# Altium PCB DPRS10A16V.PcbDoc (part 1 of 2)
Units mil, origin at the board's own origin, x right, y up, seen from the top; angles counter-clockwise.
Board outline 1945 x 1815 mil, 4 copper layers (Top Layer, Int1 (GND), Int2 (PWR), Bottom Layer), stack 45.09 mil thick; 68 components, 30 nets, 208 pads, 417 vias.
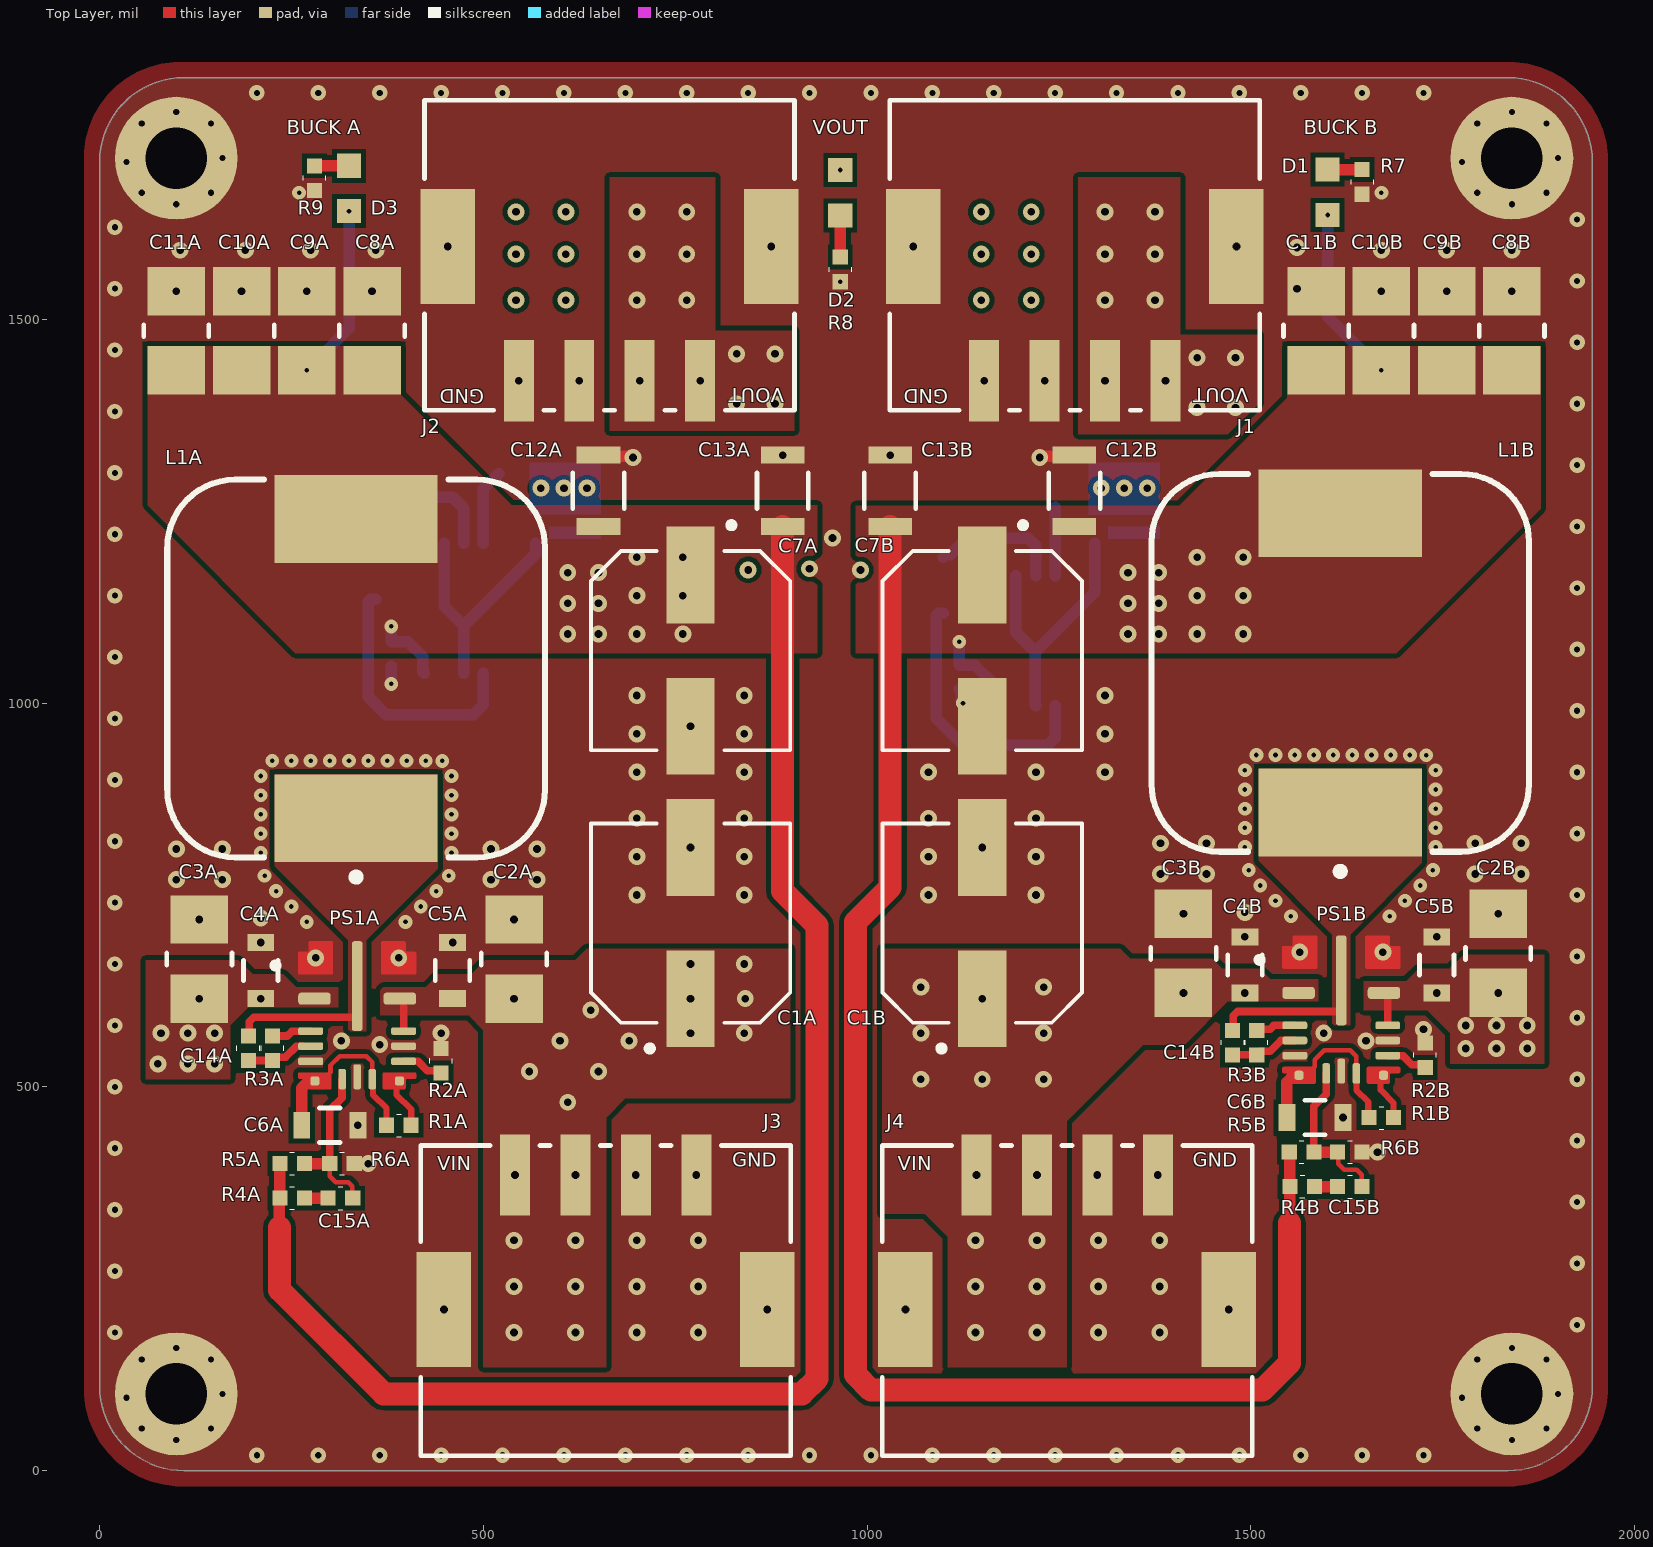
[diagram p0: Top Layer view]
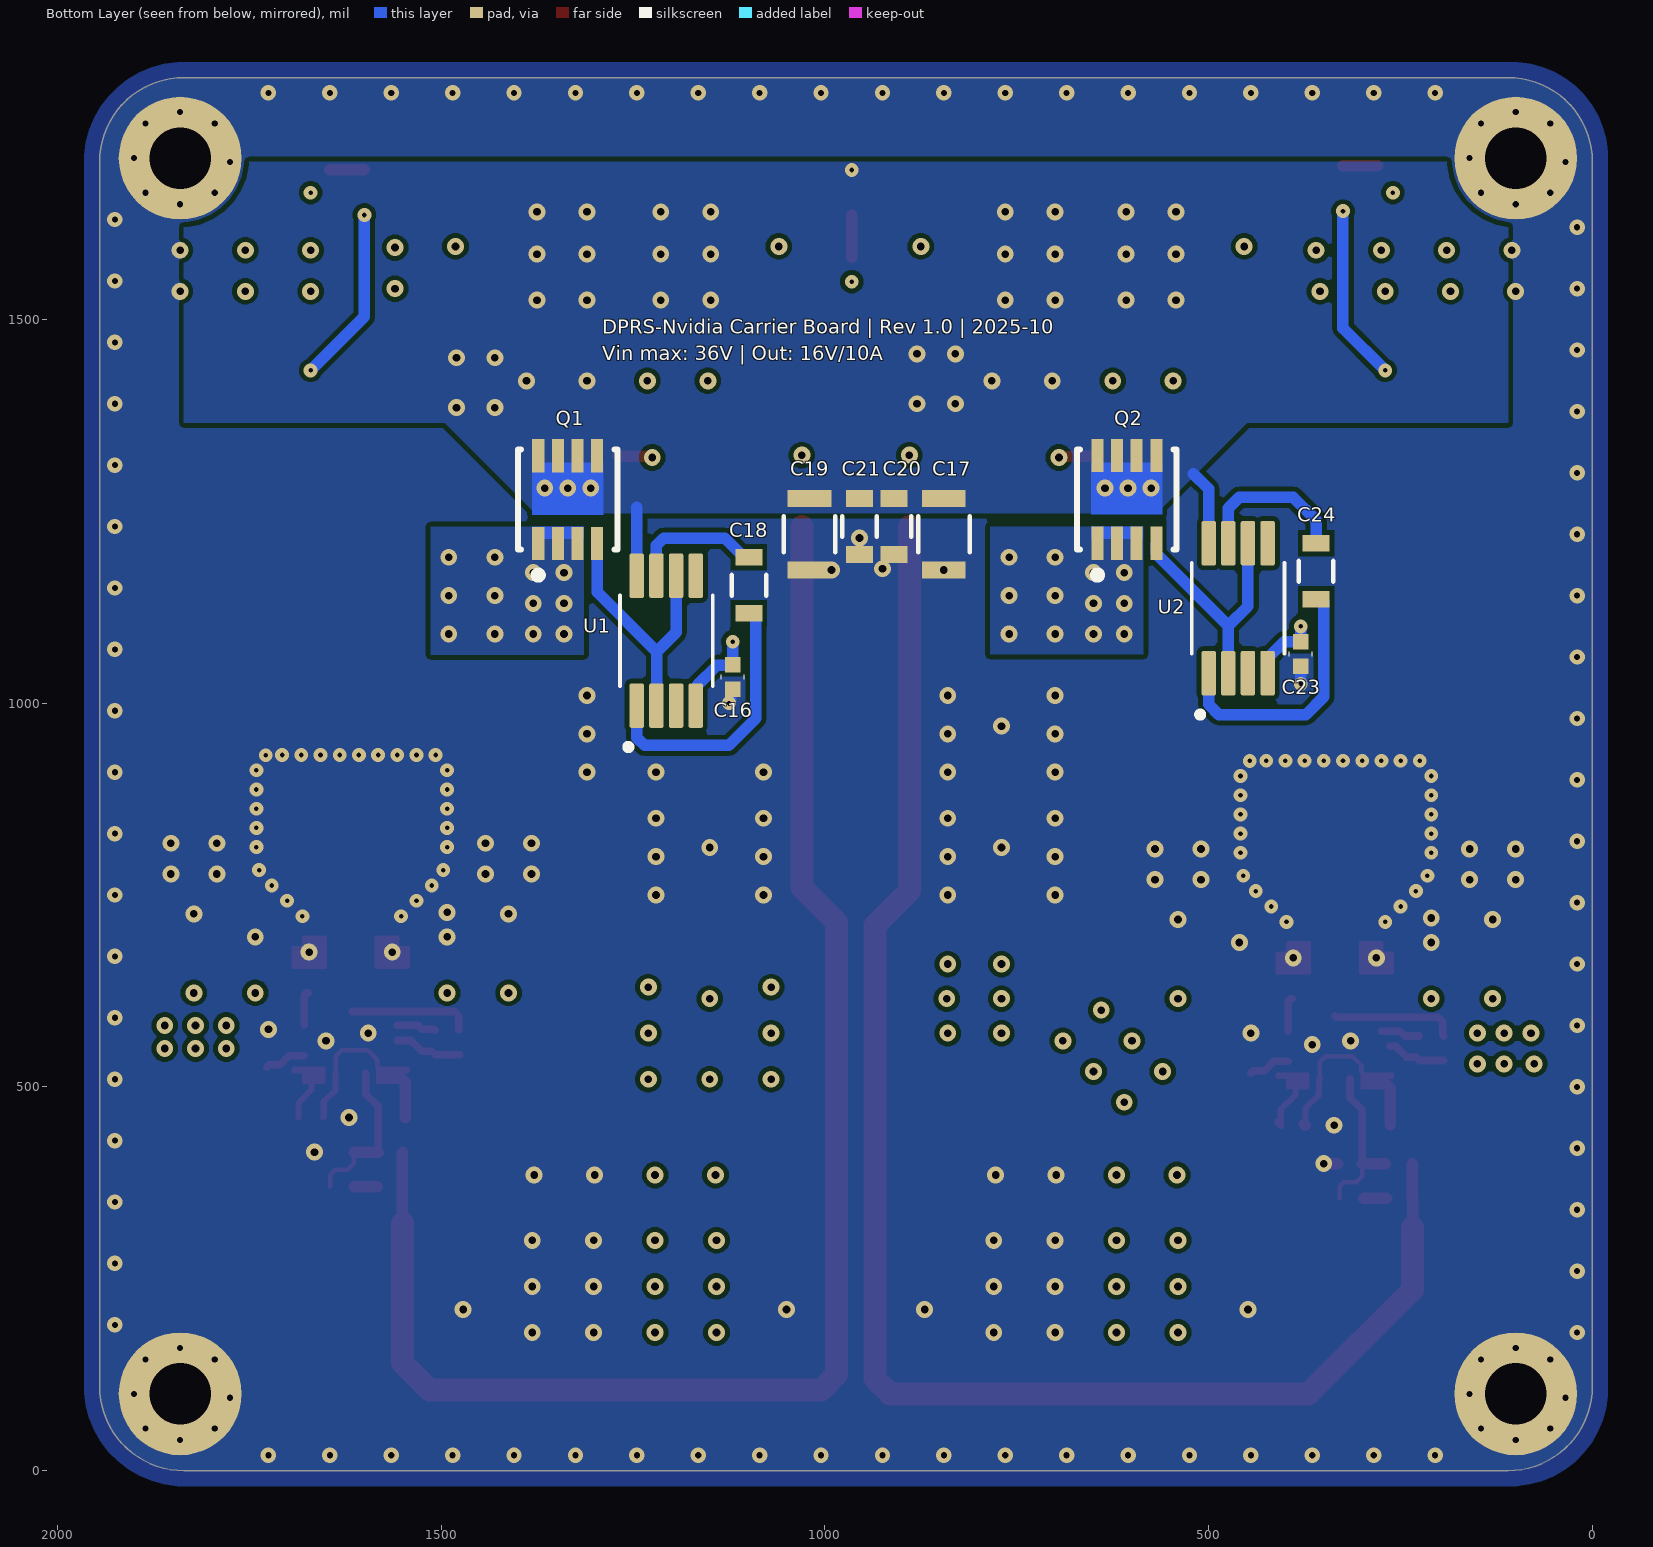
[diagram p1: Bottom Layer view, seen from below]
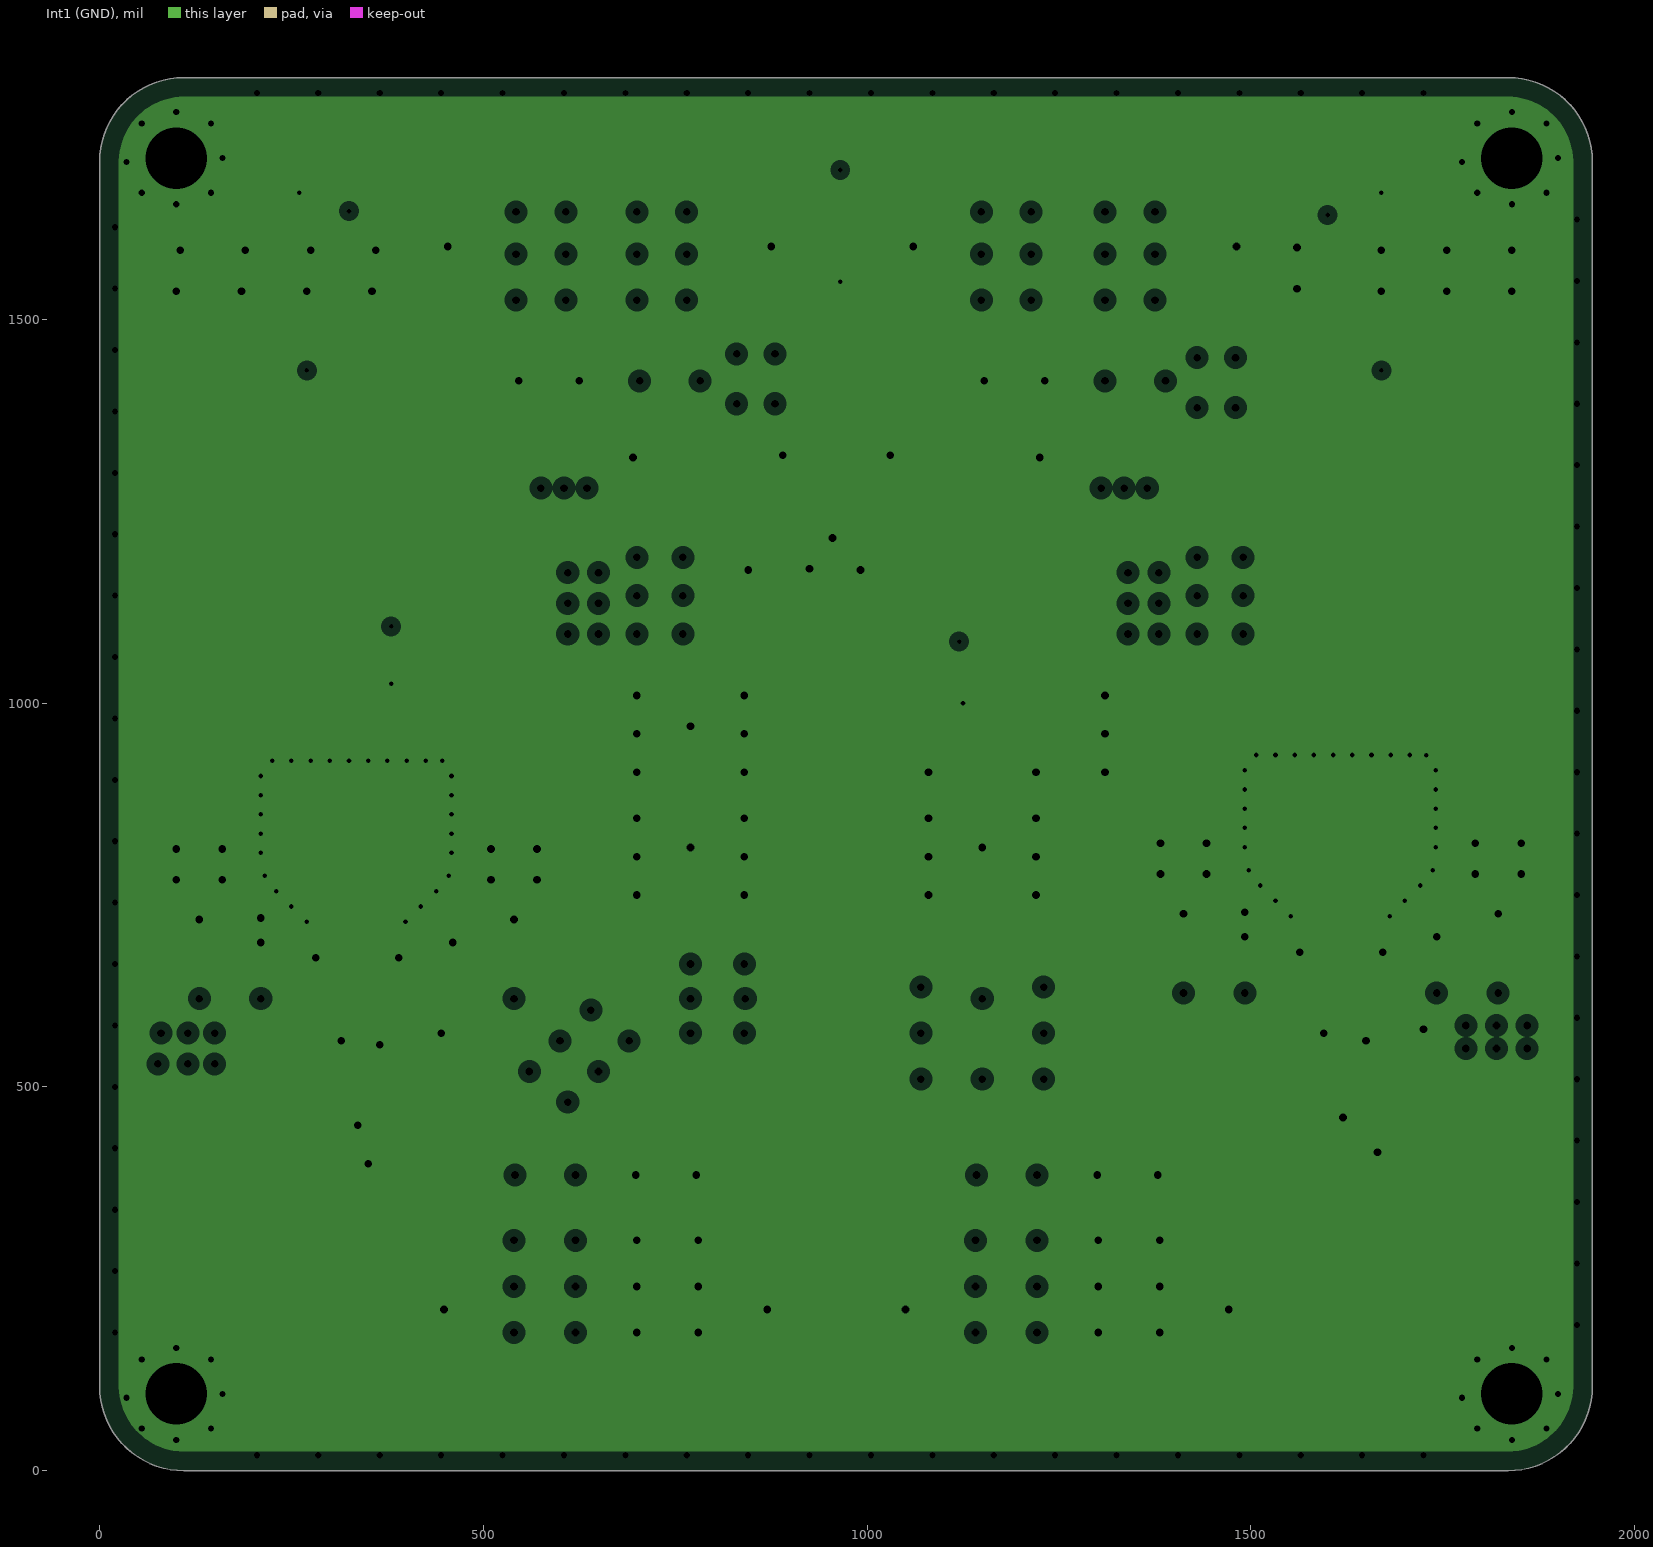
[diagram p2: Int1 (GND), clearances drawn from the general rule]
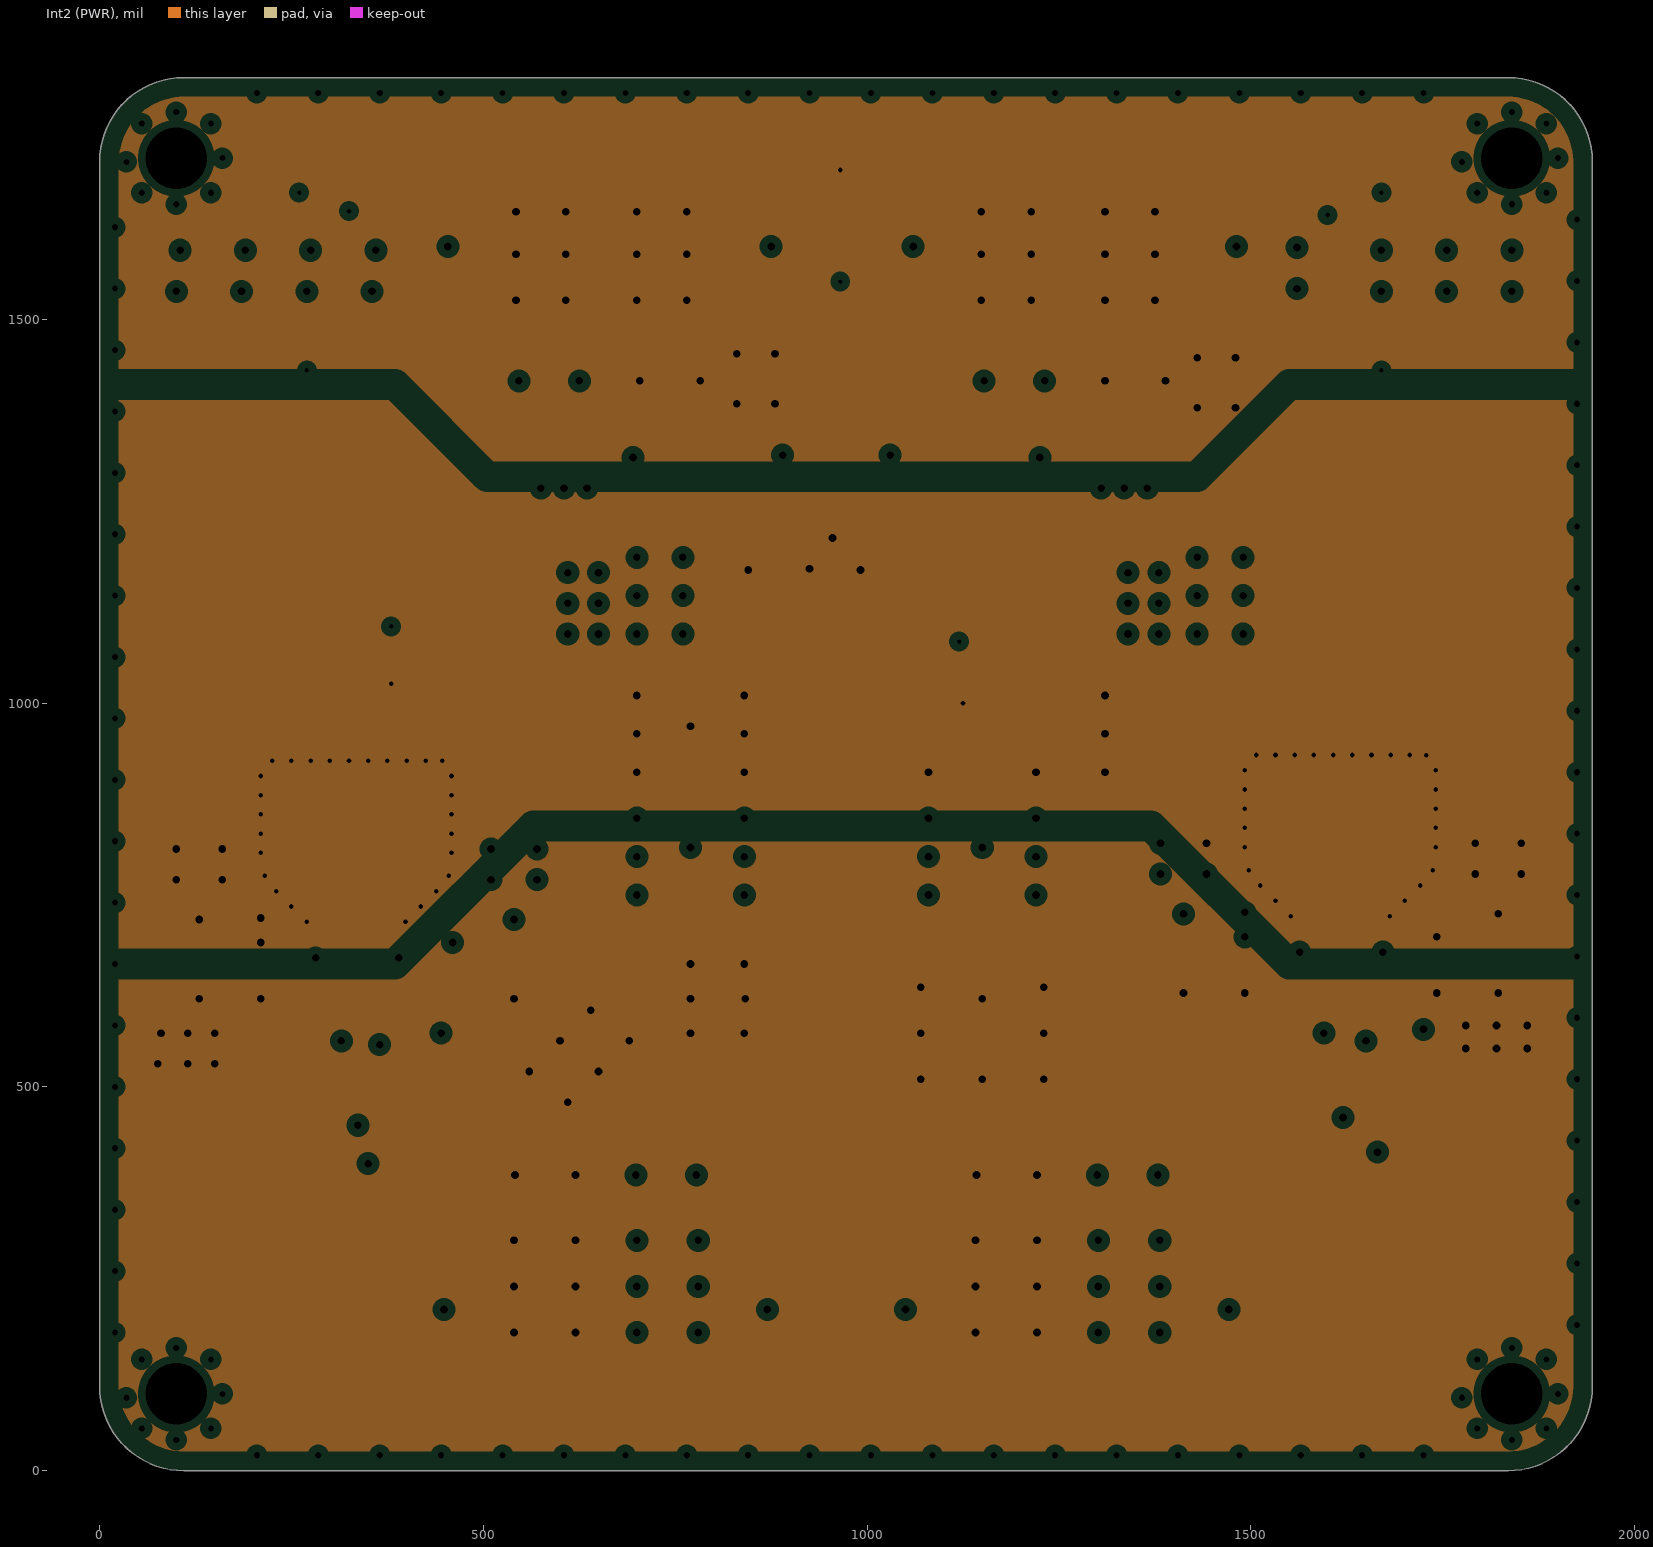
[diagram p3: Int2 (PWR), clearances drawn from the general rule]
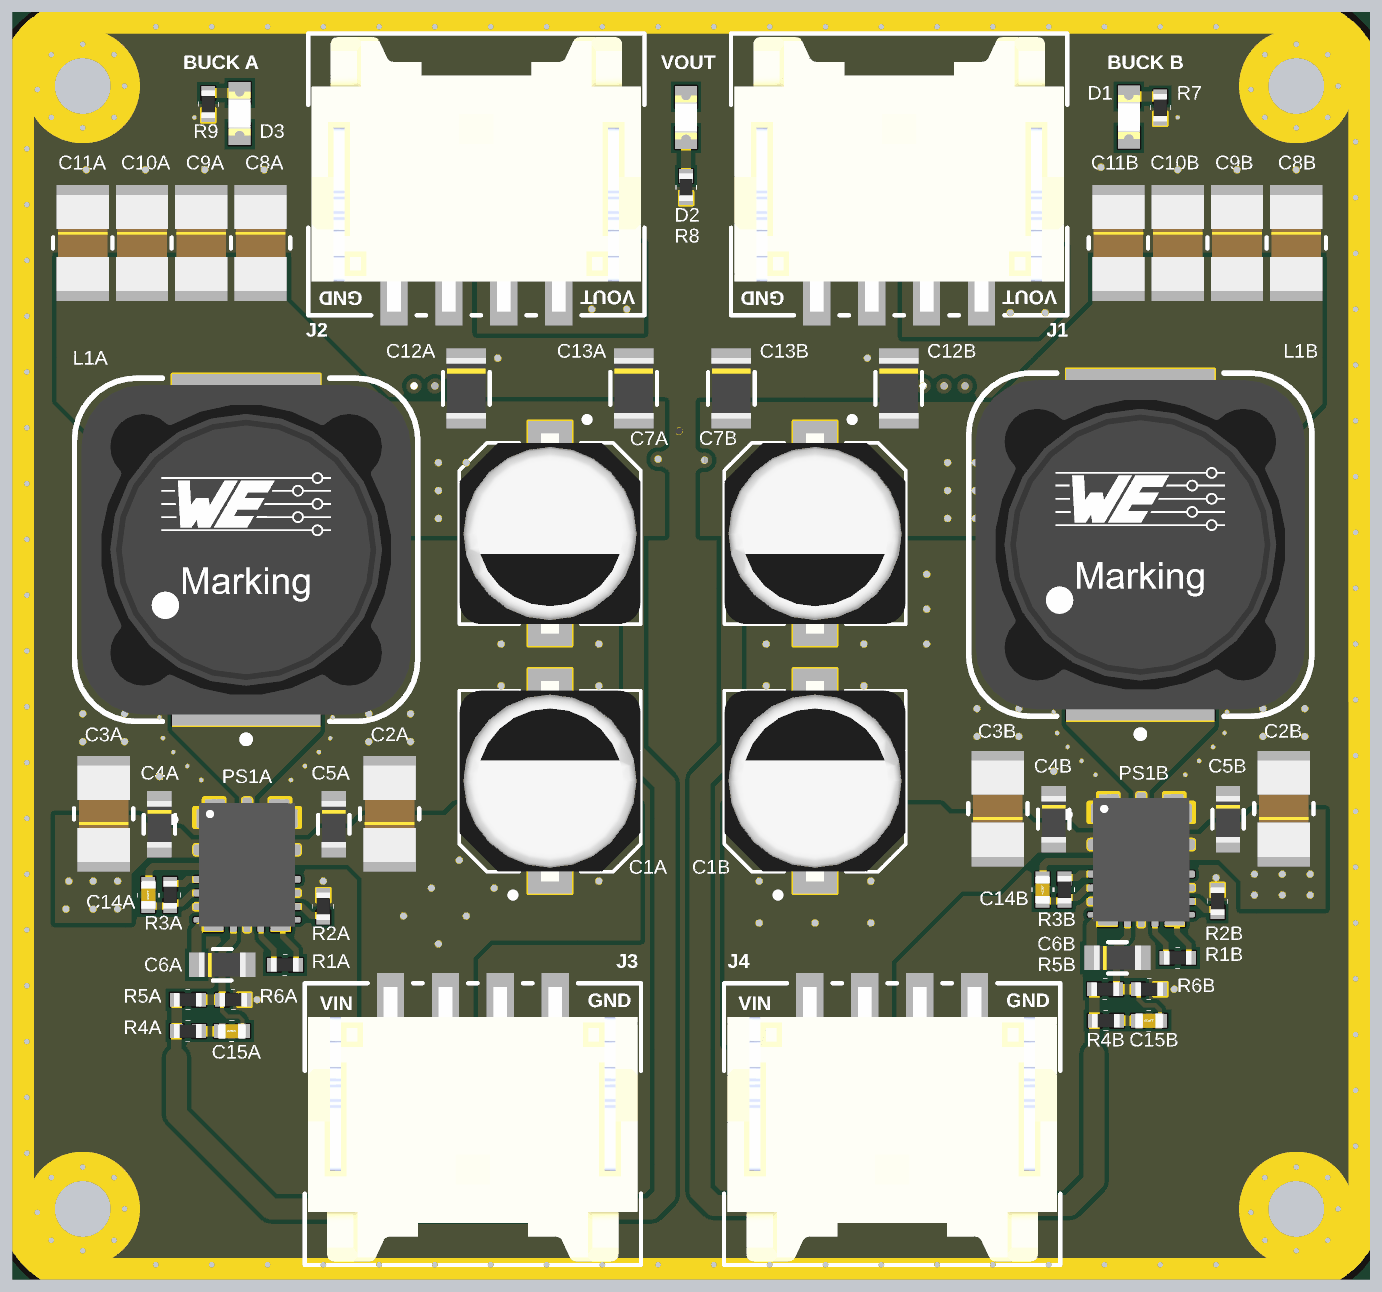
[diagram p4: 3D render of the assembled board from above, using the file's embedded part models]
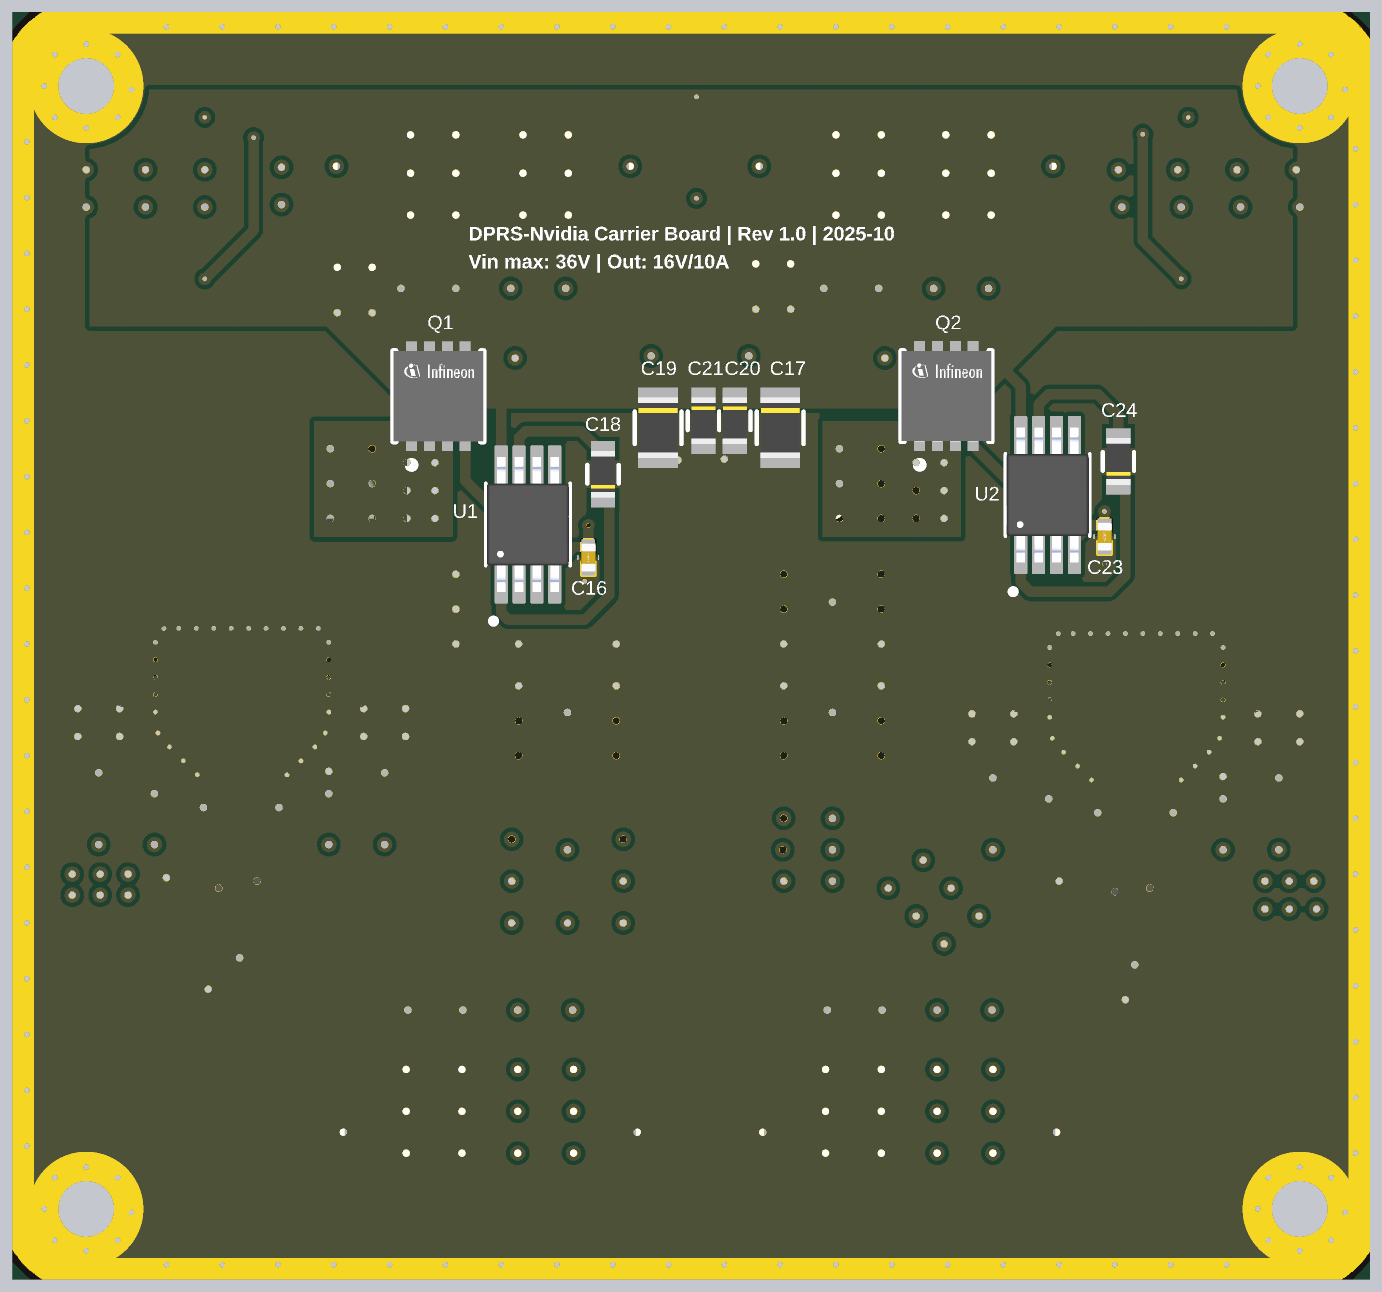
[diagram p5: 3D render of the assembled board from below, using the file's embedded part models]

## Layer stack, top to bottom
Top Solder: solder mask 1, SM-001, Dk 4
Top Layer: signal copper 2.0669
Dielectric 2: prepreg 5.1, PP-017, Dk 4.74
Int1 (GND): plane copper 1.378, net GND
Dielectric 3: core 28, Core-039, Dk 4.6
Int2 (PWR): plane copper 1.378
Dielectric 4: prepreg 5.1, PP-017, Dk 4.74
Bottom Layer: signal copper 2.0669
Bottom Solder: solder mask 1, SM-001, Dk 4

## Board outline
0,110 0,1705 cw(c110,1705) 110,1815 1835,1815 cw(c1835,1705) 1945,1705 1945,110 cw(c1835,110) 1835,0 110,0 cw(c110,110)

## Design rules (kind name [scope] priority, off if disabled: settings)
BoardOutlineClearance [All] p1: gap=10 ignorepadtopadclearanceinfootprint=FALSE except(0: Poly-OutlineEdge)
Clearance [All] p1: gap=6 ignorepadtopadclearanceinfootprint=FALSE except(10: THPad-Fill THPad-Poly THPad-Region)
HoleSize [All] p1: absolutevalues=TRUE maxlimit=236 minlimit=6 maxpercent=80.000 minpercent=20.000
HoleToHoleClearance [All] p1: gap=10 allowstackedmicrovias=FALSE
MinimumAnnularRing [All] p1: minimumring=6
MinimumSolderMaskSliver [All] p1: minsoldermaskwidth=4
PlaneClearance [All] p1: clearance=10
PlaneConnect [All] p1: planeconnectstyle=Direct reliefexpansion=20 reliefentries=4 reliefconductorwidth=10 reliefairgap=10
PolygonConnect [All] p1: connectstyle=Direct reliefconductorwidth=10 reliefentries=4 polygonreliefangle="90 Angle" airgapwidth=10
RoomDefinition ID_A [InComponentClass('ID_A')] p1: confinementstyle=ConfineIn formatcopy=TRUE lockcomponents=FALSE outline 1432.68,927 1432.68,1385 1038,1385 1038,927
RoomDefinition BUCK_A [InComponentClass('U_Buck1')] p2: confinementstyle=ConfineIn formatcopy=TRUE lockcomponents=FALSE outline 7.87,10 960,10 960,1805.28 7.87,1805.28
RoomDefinition ID_B [InComponentClass('ID_B')] p3: confinementstyle=ConfineIn formatcopy=TRUE lockcomponents=FALSE outline 690,959.92 690,1379.92 320,1379.92 320,959.92
RoomDefinition BUCK_B [InComponentClass('U_Buck2')] p4: confinementstyle=ConfineIn formatcopy=TRUE lockcomponents=FALSE outline 960,27.41 1935,27.41 1935,1805 960,1805
RoutingVias [All] p1: holewidth=6 width=18 viastyle="Through Hole" minholewidth=6 minwidth=18 maxholewidth=236 maxwidth=254
SilkToSilkClearance [All] p1: silktosilkclearance=5
SilkToSolderMaskClearance [IsPad] p1: minsilkscreentomaskgap=5 clearancetoexposedcopper=TRUE
SolderMaskExpansion [All] p1: expansion=2 istentingtop=FALSE
SupplyNets "Schematic Supply Nets" [InNet('GND')] p1: voltage=0.000
Width [All] p1: maxlimit=100 minlimit=6 preferedwidth=10
23 further rules are at their usual default settings.

## Classes and differential pairs
component class ID_B: C23 C24 Q2 U2
component class ID_A: C16 C18 Q1 U1
channel class Buck: U_Buck1 U_Buck2
component class U_Buck2: C1B C2B C3B C4B C5B C6B C7B C8B C9B C10B C11B C12B C13B C14B C15B L1B PS1B R1B R2B R3B R4B R5B R6B
component class U_Buck1: C1A C2A C3A C4A C5A C6A C7A C8A C9A C10A C11A C12A C13A C14A C15A L1A PS1A R1A R2A R3A R4A R5A R6A
component class IdealDiodeMain: C16 C17 C18 C19 C20 C21 C23 C24 D1 D2 D3 J1 J3 J4 Q1 Q2 R7 R8 R9 S U1 U2

## Components (designator, comment, footprint, x,y, rotation, side; value= is the part's Value field where it differs from the comment)
C1A "EEE-FT1H470AP" CAP_EEEFT1H470AP 770,713.43 r90 top (schematic designator C1)
C1B "EEE-FT1H470AP" CAP_EEEFT1H470AP 1150,713.43 r90 top (schematic designator C1)
C2A "C3216X7R1H106K160AC" CAP_1206 540,666.5 r270 top (schematic designator C2)
C2B "C3216X7R1H106K160AC" CAP_1206 1822.13,673.91 r270 top (schematic designator C2)
C3A "C3216X7R1H106K160AC" CAP_1206 130,666.5 r270 top (schematic designator C3)
C3B "C3216X7R1H106K160AC" CAP_1206 1412.13,673.91 r270 top (schematic designator C3)
C4A "CGA3E3X7R1H474K080AB" CAP_0603 210,651.5 r270 top (schematic designator C4)
C4B "CGA3E3X7R1H474K080AB" CAP_0603 1492.13,658.91 r270 top (schematic designator C4)
C5A "CGA3E3X7R1H474K080AB" CAP_0603 460,651.5 r270 top (schematic designator C5)
C5B "CGA3E3X7R1H474K080AB" CAP_0603 1742.13,658.91 r270 top (schematic designator C5)
C6A "TMK107B7105KA-T" CAP_0603 300,450 r0 top value=1µF (schematic designator C6)
C6B "TMK107B7105KA-T" CAP_0603 1583.5,460 r0 top value=1µF (schematic designator C6)
C7A "EEE-FT1H470AP" CAP_EEEFT1H470AP 770,1068.43 r270 top (schematic designator C7)
C7B "EEE-FT1H470AP" CAP_EEEFT1H470AP 1150,1068.43 r270 top (schematic designator C7)
C8A "C3216X5R1V226M160AC" CAP_1206 355,1485 r90 top value=22µF (schematic designator C8)
C8B "C3216X5R1V226M160AC" CAP_1206 1840,1485 r90 top value=22µF (schematic designator C8)
C9A "C3216X5R1V226M160AC" CAP_1206 270,1485 r90 top value=22µF (schematic designator C9)
C9B "C3216X5R1V226M160AC" CAP_1206 1755,1485 r90 top value=22µF (schematic designator C9)
C10A "C3216X5R1V226M160AC" CAP_1206 185,1485 r90 top value=22µF (schematic designator C10)
C10B "C3216X5R1V226M160AC" CAP_1206 1670,1485 r90 top value=22µF (schematic designator C10)
C11A "C3216X5R1V226M160AC" CAP_1206 100,1485 r90 top value=22µF (schematic designator C11)
C11B "C3216X5R1V226M160AC" CAP_1206 1585,1485 r90 top value=22µF (schematic designator C11)
C12A "CGA4J1X7R1V225K125AE" CAP_0805 650,1276.5 r270 top value=2.2µF (schematic designator C12)
C12B "CGA4J1X7R1V225K125AE" CAP_0805 1270,1276.5 r270 top value=2.2µF (schematic designator C12)
C13A "CGA4J1X7R1V225K125AE" CAP_0805 890,1276.5 r270 top value=2.2µF (schematic designator C13)
C13B "CGA4J1X7R1V225K125AE" CAP_0805 1030,1276.5 r270 top value=2.2µF (schematic designator C13)
C14A "CGA2B3X7R1H104K050BB" CAP_0402 193.98,550.3 r90 top value=100nF (schematic designator C14)
C14B "CGA2B3X7R1H104K050BB" CAP_0402 1476.11,557.71 r90 top value=100nF (schematic designator C14)
C15A "C0402C100K5RACTU" CAP_0402 313.84,355 r0 top value=10pF (schematic designator C15)
C15B "C0402C100K5RACTU" CAP_0402 1629,370 r0 top value=10pF (schematic designator C15)
C16 "CC0402KRX7R9BB101" CAP_0402 1120,1034 r90 bottom value=100pF
C17 "CGA4J1X7R1H475K125AC" CAP_0805 845,1220 r270 bottom value=4.7µF
C18 "GRM188Z71E225KE43D" CAP_0603 1099,1153.5 r90 bottom value=2.2µF
C19 "CGA4J1X7R1H475K125AC" CAP_0805 1020,1220 r270 bottom value=4.7µF
C20 "CC0603KRX7R9BB105" CAP_0603 910,1230 r270 bottom value=1µF
C21 "CC0603KRX7R9BB105" CAP_0603 955,1230 r270 bottom value=1µF
C23 "CC0402KRX7R9BB101" CAP_0402 380,1064 r90 bottom value=100pF
C24 "GRM188Z71E225KE43D" CAP_0603 360,1171.77 r90 bottom value=2.2µF
D1 "LTST-C190GKT" LEDM1608X80 1600,1665.47 r270 top
D2 "LTST-C190GKT" LEDM1608X80 965,1665 r90 top
D3 "LTST-C190GKT" LEDM1608X80 325,1670.47 r270 top
J1 "SM04B-PASS-TBT" CONN_SM04B-PASS-_JST 1270.63,1583.34 r180 top
J2 "SM04B-PASS-TBT" CONN_SM04B-PASS-_JST 664.37,1583.34 r180 top
J3 "SM04B-PASS-TBT" CONN_SM04B-PASS-_JST 659.37,221.66 r0 top
J4 "SM04B-PASS-TBT" CONN_SM04B-PASS-_JST 1260.63,221.66 r0 top
L1A "3.5uH, 11A" WE-PD_1210 334.28,1045 r0 top (schematic designator L1)
L1B "3.5uH, 11A" WE-PD_1210 1616.42,1052.41 r0 top (schematic designator L1)
PS1A "LM61495QRPHRQ1" CONV_LM61495QRPHRQ1 335.63,593.35 r0 top (schematic designator PS1)
PS1B "LM61495QRPHRQ1" CONV_LM61495QRPHRQ1 1617.76,600.76 r0 top (schematic designator PS1)
Q1 "BSZ034N04LSATMA1" INF-PG-TSDSON-8-FL 1335.12,1265.18 r90 bottom
Q2 "BSZ034N04LSATMA1" INF-PG-TSDSON-8-FL 606.61,1265.35 r90 bottom
R1A "RC0402JR-07100KL" RES_0402 390,450 r180 top value=100kΩ (schematic designator R1)
R1B "RC0402JR-07100KL" RES_0402 1670,460 r180 top value=100kΩ (schematic designator R1)
R2A "RC0402FR-1311K8L" RES_0402 445,534 r90 top value=11.8kΩ (schematic designator R2)
R2B "RC0402FR-1311K8L" RES_0402 1727.13,541.41 r90 top value=11.8kΩ (schematic designator R2)
R3A "ERJ-2GE0R00X" RES_0402 225.47,550.3 r90 top value=0Ω (schematic designator R3)
R3B "ERJ-2GE0R00X" RES_0402 1507.61,557.71 r90 top value=0Ω (schematic designator R3)
R4A "RK73H1ETTP4991F" RES_0402 250.84,355 r0 top value=4.99kΩ (schematic designator R4)
R4B "RK73H1ETTP4991F" RES_0402 1567,370 r0 top value=4.99kΩ (schematic designator R4)
R5A "RC0402JR-07100KL" RES_0402 250.84,400 r0 top value=100kΩ (schematic designator R5)
R5B "RC0402JR-07100KL" RES_0402 1566,415 r0 top value=100kΩ (schematic designator R5)
R6A "RK73H1ETTP6651F" RES_0402 315.84,400 r0 top value=6.65kΩ (schematic designator R6)
R6B "RK73H1ETTP6651F" RES_0402 1629,415 r0 top value=6.65kΩ (schematic designator R6)
R7 "ERJ-PA2F1501X" RES_0402 1645,1679 r270 top value=1.5kΩ
R8 "ERJ-PA2F1501X" RES_0402 965,1565 r270 top value=1.5kΩ
R9 "ERJ-PA2F1501X" RES_0402 280,1684 r270 top value=1.5kΩ
U1 "LM74610QDGKRQ1" SOP65P490X110-8N 1206.61,1081.35 r90 bottom
U2 "LM74610QDGKRQ1" SOP65P490X110-8N 461.61,1123.62 r90 bottom

## Footprints (in the part's own frame and the unit in brackets; to place one, negate y for a bottom-side part, rotate by r counter-clockwise, add the part's x,y. Pads: shape width x height; smd on the part's side, far side on the other; paste and mask are expansions set on the pad)
CAP_0402 [mm] "Capacitor"
  rect 0.5x0.5 smd mask+0.051: 1(-0.406,0) 2(0.406,0)
  silkscreen extent -0.08,-0.38 0.08,0.38, body extent -0.52,-0.28 0.52,0.27, height 0.55
CAP_0603 [mil]
  rect 22x35 smd paste+0 mask+0: 1(-36.5,0) 2(36.5,0)
  silkscreen extent -13,-23 13,23, body extent -34,-17 34,17, height 35
CAP_0805 [mil]
  rect 22x57 smd paste+0 mask+0: 1(-46.5,0) 2(46.5,0)
  silkscreen extent -23,-34 23,34, body extent -44,-29 44,29, height 49
CAP_1206 [mil]
  rect 63x75 smd paste+0 mask+0: 1(-51.5,0) 2(51.5,0)
  silkscreen extent -8,-42 8,42, body extent -69,-37 69,37, height 75
CAP_EEEFT1H470AP [mm]
  rect 3.2x1.6 smd: 1(-2.5,0) 2(2.5,0)
  silkscreen extent -4.25,-3.3 3.3,3.3, body extent -3.65,-3.3 3.65,3.3, height 5.8
CONN_SM04B-PASS-_JST [mil]
  rect 39x106 smd paste+0 mask+0: 1(-118.11,163.54) 2(-39.37,163.54) 3(39.37,163.54) 4(118.11,163.54)
  rect 71x150 smd paste-75 mask-75: 5(-210.63,-11.66) 6(210.63,-11.66)
  silkscreen extent -241,-202 241,202, body extent -236,-197 236,197, height 224
CONV_LM61495QRPHRQ1 [mm]
  rrect50% 0.4x0.4 smd paste-1 mask+0: 1(-1.375,1.9) 15(1.375,1.9)
  rrect50% 1.075x0.4 smd mask+0.051: 2(-1.413,0.55) 14(1.413,0.55)
  rrect50% 0.825x0.25 smd mask+0.051: 3(-1.538,-0.525) 4(-1.538,-1.025) 11(1.538,-1.525) 12(1.538,-1.025)
  rrect51% 0.825x0.25 smd mask+0.051: 5(-1.538,-1.525) 13(1.538,-0.525)
  rrect50% 0.3x0.3 smd paste-1 mask+0: 6(-1.4,-2.175) 10(1.4,-2.175)
  rrect50% 0.25x0.675 smd mask+0.051: 7(-0.5,-2.113) 9(0.5,-2.113)
  rrect50% 0.25x0.825 smd mask+0.051: 8(0,-2.038)
  rrect50% 0.35x2.975 smd mask+0.051: 16(0,0.963)
  Top Layer region: 175 vertices and 0 holes, not listed, extent -1.95,1.35 -0.8,2.45
  Top Layer region: 175 vertices and 0 holes, not listed, extent -1.95,-2.45 -0.85,-1.9
  Top Layer region: 175 vertices and 0 holes, not listed, extent 0.8,1.35 1.95,2.45
  Top Layer region: 175 vertices and 0 holes, not listed, extent 0.85,-2.45 1.95,-1.9
  silkscreen extent -2.8,1.55 -2.6,1.75, body extent -1.75,-2.25 1.75,2.25, height 1
INF-PG-TSDSON-8-FL [mm] "SON,0.65mm pitch;8 pin,3.3mm W X 3.3mm L X 1.10mm H body"
  rect 1.1x0.4 smd paste+0 mask+0: 1(-1.45,0.975) 2(-1.45,0.325) 3(-1.45,-0.325) 4(-1.45,-0.975) 5(1.45,-0.975) 6(1.45,-0.325) 7(1.45,0.325) 8(1.45,0.975)
  Top Layer region: 1.212,1.175 -0.497,1.175 -0.497,-1.175 1.212,-1.175
  Top Layer region: -0.9,-0.525 -1.3,-0.525 -1.3,1.175 -0.9,1.175
  silkscreen extent -2.62,-1.65 1.65,1.65, body extent -1.65,-1.65 1.65,1.65, height 1.01
LEDM1608X80 [mm]
  rect 0.8x0.8 smd: A(0.75,0) C(-0.75,0)
  body extent -0.8,-0.4 0.8,0.4, height 0.8
RES_0402 [mm]
  rect 0.5x0.5 smd mask+0.051: 1(-0.406,0) 2(0.406,0)
  silkscreen extent -0.08,-0.37 0.08,0.38, body extent -0.5,-0.25 0.5,0.25, height 0.3
SOP65P490X110-8N [mm]
  rrect25% 1.47x0.48 smd mask+0: 1(-2.15,0.975) 2(-2.15,0.325) 3(-2.15,-0.325) 4(-2.15,-0.975) 5(2.15,-0.975) 6(2.15,-0.325) 7(2.15,0.325) 8(2.15,0.975)
  silkscreen extent -3.62,-1.54 1.5,1.54, body extent -2.45,-1.5 2.45,1.5, height 1.1
WE-PD_1210 [mm] "SMT Shielded Power Inductor, 2-leads, body 12x12mm"
  rect 5.4x2.9 smd: 1(0,-4.95) 2(0,4.95)
  silkscreen extent -6.25,-7.02 6.25,6.25, body extent -6,-6 6,6, height 9.46

## Part data
C1A C1B C7A C7B: library part EEEFT1H470AP, "47ÂµF 50V Aluminum Electrolytic Capacitors Radial, Can - SMD 680mOhm @ 100kHz 2000 Hrs @ 105Â°C", Package="RADIAL-2 Panasonic", Check_prices=https://www.snapeda.com/parts/EEEFT1H470AP/Panasonic/view-part/?ref=eda, MF=Panasonic, MP=EEEFT1H470AP, SnapEDA_Link=https://www.snapeda.com/parts/EEEFT1H470AP/Panasonic/view-part/?ref=snap
C2A C2B C3A C3B: "10 µF ±10% 50V Ceramic Capacitor X7R 1206 (3216 Metric)", Manufacturer_Name=TDK, Copyright="Copyright (C) 2025 Ultra Librarian. All rights reserved.", Manufacturer_Part_Number=C3216X7R1H106K160AC
C4A C4B C5A C5B: "0.47 µF ±10% 50V Ceramic Capacitor X7R 0603 (1608 Metric)", Manufacturer_Name=TDK, Copyright="Copyright (C) 2025 Ultra Librarian. All rights reserved.", Manufacturer_Part_Number=CGA3E3X7R1H474K080AB
C6A C6B: "0603 1 uF 25 V ±10% Tolerance X7R SMT Multilayer Ceramic Capacitor", Case Code (Imperial)=0603, Case Code (Metric)=1608, Dielectric=X7R, Dielectric Material=Ceramic, Manufacturer="Taiyo Yuden", Max Operating Temperature=125°C, Min Operating Temperature=-55°C, Supplier Part Number=587-2984-1-ND, Tolerance=10%, Voltage Rating=25V, Case/Package=0603, Category="Ceramic Capacitors", ComponentLink1Description=https://datasheet.octopart.com:443/TMK107B7105KA-T-Taiyo-Yuden-datasheet-181961942.pdf?src-supplier=Newark, ComponentLink1URL=https://datasheet.octopart.com:443/TMK107B7105KA-T-Taiyo-Yuden-datasheet-181961942.pdf?src-supplier=Newark, ComponentLink2Description=https://datasheet.octopart.com:443/TMK107B7105KA-T-Taiyo-Yuden-datasheet-23715841.pdf?src-supplier=Newark, ComponentLink2URL=https://datasheet.octopart.com:443/TMK107B7105KA-T-Taiyo-Yuden-datasheet-23715841.pdf?src-supplier=Newark, ComponentLink3Description=https://datasheet.octopart.com:443/TMK107B7105KA-T-Taiyo-Yuden-datasheet-151625811.pdf?src-supplier=Newark, ComponentLink3URL=https://datasheet.octopart.com:443/TMK107B7105KA-T-Taiyo-Yuden-datasheet-151625811.pdf?src-supplier=Newark, ComponentLink4Description=https://datasheet.octopart.com:443/TMK107B7105KA-T-Taiyo-Yuden-datasheet-154810059.pdf?src-supplier=Master+Electronics, ComponentLink4URL=https://datasheet.octopart.com:443/TMK107B7105KA-T-Taiyo-Yuden-datasheet-154810059.pdf?src-supplier=Master+Electronics, ComponentLink5Description=https://datasheet.octopart.com/TMK107B7105KA-T-Taiyo-Yuden-datasheet-13697991.pdf, ComponentLink5URL=https://datasheet.octopart.com/TMK107B7105KA-T-Taiyo-Yuden-datasheet-13697991.pdf, ComponentLink6Description=https://datasheet.octopart.com:443/TMK107B7105KA-T-Taiyo-Yuden-datasheet-10851928.pdf?src-supplier=element14+APAC, ComponentLink6URL=https://datasheet.octopart.com:443/TMK107B7105KA-T-Taiyo-Yuden-datasheet-10851928.pdf?src-supplier=element14+APAC, ComponentLink7Description=https://datasheet.octopart.com:443/TMK107B7105KA-T-Taiyo-Yuden-datasheet-138738940.pdf?src-supplier=Taiyo+Yuden+SCT, ComponentLink7URL=https://datasheet.octopart.com:443/TMK107B7105KA-T-Taiyo-Yuden-datasheet-138738940.pdf?src-supplier=Taiyo+Yuden+SCT, ComponentLink8Description=https://datasheet.octopart.com:443/TMK107B7105KA-T-Taiyo-Yuden-datasheet-99784819.pdf?src-supplier=Future+Electronics, ComponentLink8URL=https://datasheet.octopart.com:443/TMK107B7105KA-T-Taiyo-Yuden-datasheet-99784819.pdf?src-supplier=Future+Electronics, ComponentLink9Description=https://datasheet.octopart.com:443/TMK107B7105KA-T-Taiyo-Yuden-datasheet-99833418.pdf?src-supplier=Future+Electronics, ComponentLink9URL=https://datasheet.octopart.com:443/TMK107B7105KA-T-Taiyo-Yuden-datasheet-99833418.pdf?src-supplier=Future+Electronics, ComponentLink10Description=https://datasheet.octopart.com:443/TMK107B7105KA-T-Taiyo-Yuden-datasheet-62109605.pdf?src-supplier=Electro+Sonic, ComponentLink10URL=https://datasheet.octopart.com:443/TMK107B7105KA-T-Taiyo-Yuden-datasheet-62109605.pdf?src-supplier=Electro+Sonic, ComponentLink11Description=https://datasheet.octopart.com:443/TMK107B7105KA-T-Taiyo-Yuden-datasheet-41181867.pdf?src-supplier=Electro+Sonic, ComponentLink11URL=https://datasheet.octopart.com:443/TMK107B7105KA-T-Taiyo-Yuden-datasheet-41181867.pdf?src-supplier=Electro+Sonic, Composition=Ceramic, Contact Plating=Tin, Depth=800µm, Halogen Free="Halogen Free", Height=800µm, Length=1.6mm, Lifecycle Status=Production, Manufacturer Part Number=TMK107B7105KA-T, Material=Ceramic, Max Length=1.7mm, Max Thickness=900µm, Max Width=900µm, Min Length=1.5mm, Min Thickness=700µm, Min Width=700µm, Mounting Technology="Surface Mount", Number of Terminals=2, Pins=2, Pricing="1=0.08, 10=0.010 (USD)", Radiation Hardening=No, REACH SVHC=Yes, RoHS=Compliant, Stock=501480, Supplier=DigiKey, Termination=SMD/SMT, Thickness=889µm, Voltage Rating (DC)=25V, Width=800µm
C8A C8B C9A C9B C10A C10B C11A C11B: "Multilayer Ceramic Capacitors MLCC – SMD/SMT; TDK; C3216X5R1V226M160AC; 22 µF; 1206; 35 V; 35 V", Case Code (Imperial)=1206, Case Code (Metric)=3216, Dielectric=X5R, Dielectric Material=Ceramic, Manufacturer=TDK, Manufacturer Lifecycle Status=PRODUCTION, Max Operating Temperature=85°C, Min Operating Temperature=-55°C, Supplier Part Number=445-8045-1-ND, Tolerance=20%, Voltage=35V, Case/Package=1206, Category="Ceramic Capacitors", China RoHS=Compliant, ComponentLink1Description=https://datasheet.octopart.com:443/C3216X5R1V226M160AC-TDK-datasheet-175423548.pdf?src-supplier=TME, ComponentLink1URL=https://datasheet.octopart.com:443/C3216X5R1V226M160AC-TDK-datasheet-175423548.pdf?src-supplier=TME, ComponentLink2Description=https://datasheet.octopart.com:443/C3216X5R1V226M160AC-TDK-datasheet-182135025.pdf?src-supplier=TME, ComponentLink2URL=https://datasheet.octopart.com:443/C3216X5R1V226M160AC-TDK-datasheet-182135025.pdf?src-supplier=TME, ComponentLink3Description=https://datasheet.octopart.com:443/C3216X5R1V226M160AC-TDK-datasheet-159617022.pdf?src-supplier=TME, ComponentLink3URL=https://datasheet.octopart.com:443/C3216X5R1V226M160AC-TDK-datasheet-159617022.pdf?src-supplier=TME, ComponentLink4Description=https://datasheet.octopart.com/C3216X5R1V226M160AC-TDK-datasheet-41194876.pdf, ComponentLink4URL=https://datasheet.octopart.com/C3216X5R1V226M160AC-TDK-datasheet-41194876.pdf, ComponentLink5Description=https://datasheet.octopart.com:443/C3216X5R1V226M160AC-TDK-datasheet-151546523.pdf?src-supplier=ODG+(Origin+Data+Global), ComponentLink5URL=https://datasheet.octopart.com:443/C3216X5R1V226M160AC-TDK-datasheet-151546523.pdf?src-supplier=ODG+(Origin+Data+Global), ComponentLink6Description=https://datasheet.octopart.com:443/C3216X5R1V226M160AC-TDK-datasheet-154546117.pdf?src-supplier=Newark, ComponentLink6URL=https://datasheet.octopart.com:443/C3216X5R1V226M160AC-TDK-datasheet-154546117.pdf?src-supplier=Newark, ComponentLink7Description=https://datasheet.octopart.com:443/C3216X5R1V226M160AC-TDK-datasheet-82475248.pdf?src-supplier=Newark, ComponentLink7URL=https://datasheet.octopart.com:443/C3216X5R1V226M160AC-TDK-datasheet-82475248.pdf?src-supplier=Newark, ComponentLink8Description=https://datasheet.octopart.com:443/C3216X5R1V226M160AC-TDK-datasheet-13444418.pdf?src-supplier=Newark, ComponentLink8URL=https://datasheet.octopart.com:443/C3216X5R1V226M160AC-TDK-datasheet-13444418.pdf?src-supplier=Newark, ComponentLink9Description=https://datasheet.octopart.com:443/C3216X5R1V226M160AC-TDK-datasheet-23766614.pdf?src-supplier=Newark, ComponentLink9URL=https://datasheet.octopart.com:443/C3216X5R1V226M160AC-TDK-datasheet-23766614.pdf?src-supplier=Newark, ComponentLink10Description=https://datasheet.octopart.com:443/C3216X5R1V226M160AC-TDK-datasheet-41169347.pdf?src-supplier=element14+APAC, ComponentLink10URL=https://datasheet.octopart.com:443/C3216X5R1V226M160AC-TDK-datasheet-41169347.pdf?src-supplier=element14+APAC, Composition=Ceramic, Depth=1.6mm, Height=1.6mm, Lead Free="Lead Free", Length=3.2mm, Lifecycle Status=Production, Manufacturer Part Number=C3216X5R1V226M160AC, Material=Ceramic, Max Length=3.4mm, Max Width=1.8mm, Min Length=3mm, Min Width=1.4mm, Mounting Technology="Surface Mount", Number of Terminals=2, Pricing="1=0.81, 10=0.51, 50=0.3898, 100=0.3371, 500=0.29562, 1000=0.27671 (USD)", Radiation Hardening=No, REACH SVHC=Yes, RoHS=Compliant, Schedule B="8532240020, 8532240020|8532240020|8532240020|8532240020|8532240020|8532240020|8532240020|8532240020|8532240020|8532240020|8532240020|8532240020|8532240020|8532240020|8532240020|8532240020|8532240020|8532240020|8532240020|8532240020|8532240020|8532240020|8532240020|85", Stock=260699, Supplier=DigiKey, Termination=SMD/SMT, Thickness=1.6mm, Voltage Rating=35V, Voltage Rating (DC)=35V, Weight=16.187578mg, Width=1.6mm
C12A C12B C13A C13B: "Cap Ceramic 2.2uF 35V X7R 10% Pad SMD 0805 Soft Termination 125C Automotive T/R", Case Code (Imperial)=0805, Case Code (Metric)=2012, Dielectric=X7R, Dielectric Material=Ceramic, Manufacturer=TDK, Manufacturer Lifecycle Status=PRODUCTION, Max Operating Temperature=125°C, Min Operating Temperature=-55°C, Ratings=AEC-Q200, Supplier Part Number=445-8787-1-ND, Tolerance=10%, Voltage Rating=35V, Case/Package=0805, Category="Ceramic Capacitors", China RoHS=Compliant, ComponentLink1Description=https://datasheet.octopart.com:443/CGA4J1X7R1V225K125AE-TDK-datasheet-181961979.pdf?src-supplier=IHS, ComponentLink1URL=https://datasheet.octopart.com:443/CGA4J1X7R1V225K125AE-TDK-datasheet-181961979.pdf?src-supplier=IHS, ComponentLink2Description=https://datasheet.octopart.com:443/CGA4J1X7R1V225K125AE-TDK-datasheet-57863114.pdf?src-supplier=Newark, ComponentLink2URL=https://datasheet.octopart.com:443/CGA4J1X7R1V225K125AE-TDK-datasheet-57863114.pdf?src-supplier=Newark, ComponentLink3Description=https://datasheet.octopart.com:443/CGA4J1X7R1V225K125AE-TDK-datasheet-82475251.pdf?src-supplier=Newark, ComponentLink3URL=https://datasheet.octopart.com:443/CGA4J1X7R1V225K125AE-TDK-datasheet-82475251.pdf?src-supplier=Newark, ComponentLink4Description=https://datasheet.octopart.com:443/CGA4J1X7R1V225K125AE-TDK-datasheet-153441518.pdf?src-supplier=TDK, ComponentLink4URL=https://datasheet.octopart.com:443/CGA4J1X7R1V225K125AE-TDK-datasheet-153441518.pdf?src-supplier=TDK, ComponentLink5Description=https://datasheet.octopart.com:443/CGA4J1X7R1V225K125AE-TDK-datasheet-165583812.pdf?src-supplier=TME, ComponentLink5URL=https://datasheet.octopart.com:443/CGA4J1X7R1V225K125AE-TDK-datasheet-165583812.pdf?src-supplier=TME, Depth=1.25mm, Features="Soft Termination", Height=1.25mm, Length=2mm, Lifecycle Status=Production, Manufacturer Part Number=CGA4J1X7R1V225K125AE, Material=Ceramic, Max Length=2.45mm, Max Width=1.5mm, Min Length=1.8mm, Min Width=1.05mm, Mounting Technology="Surface Mount", Number of Terminals=2, Pricing="1=0.66, 10=0.395, 50=0.301, 100=0.2616, 500=0.23234, 1000=0.21653 (USD)", REACH SVHC=Yes, RoHS=Compliant, Schedule B="8532240020, 8532240020|8532240020|8532240020|8532240020|8532240020", Stock=669506, Supplier=DigiKey, Termination=SMD/SMT, Thickness=1.4478mm, Voltage Rating (DC)=35V, Weight=5.499807mg, Width=1.25mm
C14A C14B: "CGA Series 0402 100 nF 50 V ±10 % Tolerance X7R SMT Multilayer Ceramic Capacitor", Case Code (Imperial)=0402, Case Code (Metric)=1005, Dielectric=X7R, Dielectric Material=Ceramic, Manufacturer=TDK, Manufacturer Lifecycle Status=PRODUCTION, Max Operating Temperature=125°C, Min Operating Temperature=-55°C, Ratings=AEC-Q200, Supplier Part Number=445-6899-1-ND, Tolerance=10%, Voltage=50V, Case/Package=0402, Category="Ceramic Capacitors", China RoHS=Compliant, ComponentLink1Description=https://datasheet.octopart.com:443/CGA2B3X7R1H104K050BB-TDK-datasheet-165583812.pdf?src-supplier=IHS, ComponentLink1URL=https://datasheet.octopart.com:443/CGA2B3X7R1H104K050BB-TDK-datasheet-165583812.pdf?src-supplier=IHS, ComponentLink2Description=https://datasheet.octopart.com:443/CGA2B3X7R1H104K050BB-TDK-datasheet-138890726.pdf?src-supplier=Upverter, ComponentLink2URL=https://datasheet.octopart.com:443/CGA2B3X7R1H104K050BB-TDK-datasheet-138890726.pdf?src-supplier=Upverter, ComponentLink3Description=https://datasheet.octopart.com:443/CGA2B3X7R1H104K050BB-TDK-datasheet-151546526.pdf?src-supplier=ODG+(Origin+Data+Global), ComponentLink3URL=https://datasheet.octopart.com:443/CGA2B3X7R1H104K050BB-TDK-datasheet-151546526.pdf?src-supplier=ODG+(Origin+Data+Global), ComponentLink4Description=https://datasheet.octopart.com:443/CGA2B3X7R1H104K050BB-TDK-datasheet-159510193.pdf?src-supplier=Newark, ComponentLink4URL=https://datasheet.octopart.com:443/CGA2B3X7R1H104K050BB-TDK-datasheet-159510193.pdf?src-supplier=Newark, ComponentLink5Description=https://datasheet.octopart.com:443/CGA2B3X7R1H104K050BB-TDK-datasheet-21217900.pdf?src-supplier=Newark, ComponentLink5URL=https://datasheet.octopart.com:443/CGA2B3X7R1H104K050BB-TDK-datasheet-21217900.pdf?src-supplier=Newark, ComponentLink6Description=https://datasheet.octopart.com:443/CGA2B3X7R1H104K050BB-TDK-datasheet-43366117.pdf?src-supplier=Newark, ComponentLink6URL=https://datasheet.octopart.com:443/CGA2B3X7R1H104K050BB-TDK-datasheet-43366117.pdf?src-supplier=Newark, ComponentLink7Description=https://datasheet.octopart.com:443/CGA2B3X7R1H104K050BB-TDK-datasheet-33009218.pdf?src-supplier=Newark, ComponentLink7URL=https://datasheet.octopart.com:443/CGA2B3X7R1H104K050BB-TDK-datasheet-33009218.pdf?src-supplier=Newark, ComponentLink8Description=https://datasheet.octopart.com:443/CGA2B3X7R1H104K050BB-TDK-datasheet-13376850.pdf?src-supplier=Newark, ComponentLink8URL=https://datasheet.octopart.com:443/CGA2B3X7R1H104K050BB-TDK-datasheet-13376850.pdf?src-supplier=Newark, ComponentLink9Description=https://datasheet.octopart.com:443/CGA2B3X7R1H104K050BB-TDK-datasheet-12956201.pdf?src-supplier=Newark, ComponentLink9URL=https://datasheet.octopart.com:443/CGA2B3X7R1H104K050BB-TDK-datasheet-12956201.pdf?src-supplier=Newark, ComponentLink10Description=https://datasheet.octopart.com:443/CGA2B3X7R1H104K050BB-TDK-datasheet-164882302.pdf?src-supplier=Burklin+Elektronik, ComponentLink10URL=https://datasheet.octopart.com:443/CGA2B3X7R1H104K050BB-TDK-datasheet-164882302.pdf?src-supplier=Burklin+Elektronik, ComponentLink11Description=https://datasheet.octopart.com:443/CGA2B3X7R1H104K050BB-TDK-datasheet-13234200.pdf?src-supplier=Future+Electronics, ComponentLink11URL=https://datasheet.octopart.com:443/CGA2B3X7R1H104K050BB-TDK-datasheet-13234200.pdf?src-supplier=Future+Electronics, ComponentLink12Description=https://datasheet.octopart.com:443/CGA2B3X7R1H104K050BB-TDK-datasheet-12527010.pdf?src-supplier=Future+Electronics, ComponentLink12URL=https://datasheet.octopart.com:443/CGA2B3X7R1H104K050BB-TDK-datasheet-12527010.pdf?src-supplier=Future+Electronics, ComponentLink13Description=https://datasheet.octopart.com:443/CGA2B3X7R1H104K050BB-TDK-datasheet-140571036.pdf?src-supplier=Arrow.cn, ComponentLink13URL=https://datasheet.octopart.com:443/CGA2B3X7R1H104K050BB-TDK-datasheet-140571036.pdf?src-supplier=Arrow.cn, Composition=Ceramic, Depth=500µm, Height=500µm, Lead Free="Lead Free", Length=1mm, Lifecycle Status=Production, Manufacturer Part Number=CGA2B3X7R1H104K050BB, Material=Ceramic, Max Length=1.05mm, Max Width=550µm, Min Length=950µm, Min Width=450µm, Mounting Technology="Surface Mount", Number of Terminals=2, Pricing="1=0.13, 10=0.072, 50=0.05, 100=0.0434, 500=0.03172, 1000=0.02889, 2500=0.0253, 5000=0.02314 (USD)", REACH SVHC=Yes, RoHS=Compliant, Schedule B="8532240020, 8532240020|8532240020|8532240020|8532240020|8532240020|8532240020|8532240020|8532240020|8532240020|8532240020|8532240020|8532240020|8532240020|8532240020|8532240020|8532240020|8532240020|8532240020|8532240020|8532240020|8532240020|8532240020|8532240020|85", Stock=4086193, Supplier=DigiKey, Termination=SMD/SMT, Thickness=558.8µm, Voltage Rating=50V, Voltage Rating (DC)=50V, Weight=652.039032µg, Width=500µm
C15A C15B: "Multilayer Ceramic Capacitors MLCC - SMD/SMT 50V 10pF X7R 0402 10%", Case/Package=0402, Dielectric=X7R, Dielectric Material=Ceramic, Manufacturer=KEMET, Max Operating Temperature=125°C, Min Operating Temperature=-55°C, Supplier Part Number=399-C0402C100K5RACTUCT-ND, Tolerance=10%, Voltage Rating=50V, Category="Ceramic Capacitors", China RoHS=Compliant, ComponentLink1Description=https://datasheet.octopart.com:443/C0402C100K5RACTU-KEMET-datasheet-178445679.pdf?src-supplier=IHS, ComponentLink1URL=https://datasheet.octopart.com:443/C0402C100K5RACTU-KEMET-datasheet-178445679.pdf?src-supplier=IHS, ComponentLink2Description=https://datasheet.octopart.com:443/C0402C100K5RACTU-KEMET-datasheet-137357759.pdf?src-supplier=Farnell, ComponentLink2URL=https://datasheet.octopart.com:443/C0402C100K5RACTU-KEMET-datasheet-137357759.pdf?src-supplier=Farnell, ComponentLink3Description=https://datasheet.octopart.com:443/C0402C100K5RACTU-KEMET-datasheet-101607523.pdf?src-supplier=Farnell, ComponentLink3URL=https://datasheet.octopart.com:443/C0402C100K5RACTU-KEMET-datasheet-101607523.pdf?src-supplier=Farnell, ComponentLink4Description=https://datasheet.octopart.com:443/C0402C100K5RACTU-KEMET-datasheet-157246124.pdf?src-supplier=Electro+Sonic, ComponentLink4URL=https://datasheet.octopart.com:443/C0402C100K5RACTU-KEMET-datasheet-157246124.pdf?src-supplier=Electro+Sonic, ComponentLink5Description=https://datasheet.octopart.com:443/C0402C100K5RACTU-KEMET-datasheet-178087912.pdf?src-supplier=Newark, ComponentLink5URL=https://datasheet.octopart.com:443/C0402C100K5RACTU-KEMET-datasheet-178087912.pdf?src-supplier=Newark, ComponentLink6Description=https://datasheet.octopart.com:443/C0402C100K5RACTU-KEMET-datasheet-188904202.pdf?src-supplier=TME, ComponentLink6URL=https://datasheet.octopart.com:443/C0402C100K5RACTU-KEMET-datasheet-188904202.pdf?src-supplier=TME, ComponentLink7Description=https://datasheet.octopart.com:443/C0402C100K5RACTU-KEMET-datasheet-158241862.pdf?src-supplier=TME, ComponentLink7URL=https://datasheet.octopart.com:443/C0402C100K5RACTU-KEMET-datasheet-158241862.pdf?src-supplier=TME, ComponentLink8Description=https://datasheet.octopart.com:443/C0402C100K5RACTU-KEMET-datasheet-147336158.pdf?src-supplier=Ciiva, ComponentLink8URL=https://datasheet.octopart.com:443/C0402C100K5RACTU-KEMET-datasheet-147336158.pdf?src-supplier=Ciiva, ComponentLink9Description=https://datasheet.octopart.com/C0402C100K5RACTU-KEMET-datasheet-84169754.pdf, ComponentLink9URL=https://datasheet.octopart.com/C0402C100K5RACTU-KEMET-datasheet-84169754.pdf, Height=500µm, Length=1mm, Lifecycle Status=Production, Manufacturer Part Number=C0402C100K5RACTU, Material=Ceramic, Mounting Technology="Surface Mount", Number of Terminals=2, Pins=2, Pricing="1=0.1, 10=0.042, 50=0.0282, 100=0.0243, 500=0.01752, 1000=0.01547, 2500=0.01322, 5000=0.01199 (USD)", REACH SVHC=Yes, RoHS=Compliant, Schedule B=8532240020, Stock=72570, Supplier=DigiKey, Voltage Rating (DC)=50V, Width=500µm
C16 C23: "50V 100pF X7R ±10% 0402 Multilayer Ceramic Capacitors MLCC - SMD/SMT ROHS", Case Code (Imperial)=0402, Case Code (Metric)=1005, Dielectric=X7R, Dielectric Material=Ceramic, Insulation Resistance=100GΩ, Manufacturer="Yageo Group", Max Operating Temperature=125°C, Min Operating Temperature=-55°C, Supplier Part Number=311-1419-1-ND, Temperature Coefficient=30ppm/°C, Tolerance=10%, Voltage Rating=50V, Case/Package=0402, Category="Ceramic Capacitors", China RoHS=Compliant, ComponentLink1Description=https://datasheet.octopart.com:443/CC0402KRX7R9BB101-Yageo-datasheet-177165144.pdf?src-supplier=IHS, ComponentLink1URL=https://datasheet.octopart.com:443/CC0402KRX7R9BB101-Yageo-datasheet-177165144.pdf?src-supplier=IHS, ComponentLink2Description=https://datasheet.octopart.com/CC0402KRX7R9BB101-Yageo-datasheet-10883670.pdf, ComponentLink2URL=https://datasheet.octopart.com/CC0402KRX7R9BB101-Yageo-datasheet-10883670.pdf, ComponentLink3Description=https://datasheet.octopart.com/CC0402KRX7R9BB101-Yageo-datasheet-12526321.pdf, ComponentLink3URL=https://datasheet.octopart.com/CC0402KRX7R9BB101-Yageo-datasheet-12526321.pdf, ComponentLink4Description=https://datasheet.octopart.com:443/CC0402KRX7R9BB101-Yageo-datasheet-78855684.pdf?src-supplier=Upverter, ComponentLink4URL=https://datasheet.octopart.com:443/CC0402KRX7R9BB101-Yageo-datasheet-78855684.pdf?src-supplier=Upverter, ComponentLink5Description=https://datasheet.octopart.com:443/CC0402KRX7R9BB101-Yageo-datasheet-147453679.pdf?src-supplier=Newark, ComponentLink5URL=https://datasheet.octopart.com:443/CC0402KRX7R9BB101-Yageo-datasheet-147453679.pdf?src-supplier=Newark, ComponentLink6Description=https://datasheet.octopart.com:443/CC0402KRX7R9BB101-Yageo-datasheet-5301394.pdf?src-supplier=Newark, ComponentLink6URL=https://datasheet.octopart.com:443/CC0402KRX7R9BB101-Yageo-datasheet-5301394.pdf?src-supplier=Newark, ComponentLink7Description=https://datasheet.octopart.com:443/CC0402KRX7R9BB101-Yageo-datasheet-62336348.pdf?src-supplier=element14+APAC, ComponentLink7URL=https://datasheet.octopart.com:443/CC0402KRX7R9BB101-Yageo-datasheet-62336348.pdf?src-supplier=element14+APAC, ComponentLink8Description=https://datasheet.octopart.com:443/CC0402KRX7R9BB101-Yageo-datasheet-166511530.pdf?src-supplier=Future+Electronics, ComponentLink8URL=https://datasheet.octopart.com:443/CC0402KRX7R9BB101-Yageo-datasheet-166511530.pdf?src-supplier=Future+Electronics, ComponentLink9Description=https://datasheet.octopart.com:443/CC0402KRX7R9BB101-Yageo-datasheet-137700082.pdf?src-supplier=Future+Electronics, ComponentLink9URL=https://datasheet.octopart.com:443/CC0402KRX7R9BB101-Yageo-datasheet-137700082.pdf?src-supplier=Future+Electronics, ComponentLink10Description=https://datasheet.octopart.com:443/CC0402KRX7R9BB101-Yageo-datasheet-137700084.pdf?src-supplier=Future+Electronics, ComponentLink10URL=https://datasheet.octopart.com:443/CC0402KRX7R9BB101-Yageo-datasheet-137700084.pdf?src-supplier=Future+Electronics, ComponentLink11Description=https://datasheet.octopart.com:443/CC0402KRX7R9BB101-Yageo-datasheet-27626582.pdf?src-supplier=Future+Electronics, ComponentLink11URL=https://datasheet.octopart.com:443/CC0402KRX7R9BB101-Yageo-datasheet-27626582.pdf?src-supplier=Future+Electronics, ComponentLink12Description=https://datasheet.octopart.com:443/CC0402KRX7R9BB101-Yageo-datasheet-24578986.pdf?src-supplier=Future+Electronics, ComponentLink12URL=https://datasheet.octopart.com:443/CC0402KRX7R9BB101-Yageo-datasheet-24578986.pdf?src-supplier=Future+Electronics, ComponentLink13Description=https://datasheet.octopart.com:443/CC0402KRX7R9BB101-Yageo-datasheet-15895757.pdf?src-supplier=Future+Electronics, ComponentLink13URL=https://datasheet.octopart.com:443/CC0402KRX7R9BB101-Yageo-datasheet-15895757.pdf?src-supplier=Future+Electronics, ComponentLink14Description=https://datasheet.octopart.com:443/CC0402KRX7R9BB101-Yageo-datasheet-8324192.pdf?src-supplier=Future+Electronics, ComponentLink14URL=https://datasheet.octopart.com:443/CC0402KRX7R9BB101-Yageo-datasheet-8324192.pdf?src-supplier=Future+Electronics, ComponentLink15Description=https://datasheet.octopart.com:443/CC0402KRX7R9BB101-Yageo-datasheet-151948686.pdf?src-supplier=Farnell, ComponentLink15URL=https://datasheet.octopart.com:443/CC0402KRX7R9BB101-Yageo-datasheet-151948686.pdf?src-supplier=Farnell, ComponentLink16Description=http://sigma.octopart.com:80/rohs_statement/Surface-Mount-Ceramic-Multilayer-Capacitors%3B-General-Purpose-%26-High-Capacitance-Class-2%2C-X7R-Yageo-family-124.pdf?src-supplier=Compliance+Statements, ComponentLink16URL=http://sigma.octopart.com:80/rohs_statement/Surface-Mount-Ceramic-Multilayer-Capacitors%3B-General-Purpose-%26-High-Capacitance-Class-2%2C-X7R-Yageo-family-124.pdf?src-supplier=Compliance+Statements, ComponentLink17Description=http://sigma.octopart.com:80/reach_statement/Surface-Mount-Ceramic-Multilayer-Capacitors%3B-General-Purpose-%26-High-Capacitance-Class-2%2C-X7R-Yageo-family-125.pdf?src-supplier=Compliance+Statements, ComponentLink17URL=http://sigma.octopart.com:80/reach_statement/Surface-Mount-Ceramic-Multilayer-Capacitors%3B-General-Purpose-%26-High-Capacitance-Class-2%2C-X7R-Yageo-family-125.pdf?src-supplier=Compliance+Statements, ComponentLink18Description=http://sigma.octopart.com:80/rohs_statement/Yageo-company-2.pdf?src-supplier=Compliance+Statements, ComponentLink18URL=http://sigma.octopart.com:80/rohs_statement/Yageo-company-2.pdf?src-supplier=Compliance+Statements, ComponentLink19Description=http://sigma.octopart.com:80/conflict_mineral_statement/Yageo-company-3.pdf?src-supplier=Compliance+Statements, ComponentLink19URL=http://sigma.octopart.com:80/conflict_mineral_statement/Yageo-company-3.pdf?src-supplier=Compliance+Statements, Composition=Ceramic, Depth=500µm, Halogen Free="Halogen Free", Height=500µm, Lead Free="Lead Free", Length=1mm, Lifecycle Status=Production, Manufacturer Part Number=CC0402KRX7R9BB101, Material=Ceramic, Mounting Technology="Surface Mount", Number of Terminals=2, Pins=2, Pricing="1=0.1, 10=0.024, 50=0.0156, 100=0.0133, 500=0.00926, 1000=0.00791, 2500=0.00676, 5000=0.00609 (USD)", Radiation Hardening=No, REACH SVHC=Yes, RoHS=Compliant, Schedule B="8532240020, 8532240020|8532240020, 8532240020|8532240020|8532240020, 8532240020|8532240020|8532240020|8532240020", Stock=385904, Supplier=DigiKey, Termination=SMD/SMT, Thickness=558.8µm, Voltage Rating (AC)=50V, Voltage Rating (DC)=50V, Weight=652.039032µg, Width=500µm
C17 C19: "Ceramic Capacitor, Multilayer, Ceramic, 50V, 10% +Tol, 10% -Tol, X7R, 15% TC, 4.7uF, Surface Mount, 0805", Case/Package=0805, Dielectric Material=Ceramic, Manufacturer=TDK, Manufacturer Lifecycle Status=PRODUCTION, Max Operating Temperature=125°C, Min Operating Temperature=-55°C, Supplier Part Number=445-181404-1-ND, Voltage Rating=50V, Category="Ceramic Capacitors", China RoHS=Compliant, ComponentLink1Description=https://datasheet.octopart.com:443/CGA4J1X7R1H475K125AC-TDK-datasheet-165583812.pdf?src-supplier=IHS, ComponentLink1URL=https://datasheet.octopart.com:443/CGA4J1X7R1H475K125AC-TDK-datasheet-165583812.pdf?src-supplier=IHS, ComponentLink2Description=https://datasheet.octopart.com:443/CGA4J1X7R1H475K125AC-TDK-datasheet-138890726.pdf?src-supplier=Future+Electronics, ComponentLink2URL=https://datasheet.octopart.com:443/CGA4J1X7R1H475K125AC-TDK-datasheet-138890726.pdf?src-supplier=Future+Electronics, ComponentLink3Description=https://datasheet.octopart.com:443/CGA4J1X7R1H475K125AC-TDK-datasheet-151546526.pdf?src-supplier=TDK, ComponentLink3URL=https://datasheet.octopart.com:443/CGA4J1X7R1H475K125AC-TDK-datasheet-151546526.pdf?src-supplier=TDK, ComponentLink4Description=https://datasheet.octopart.com:443/CGA4J1X7R1H475K125AC-TDK-datasheet-140571036.pdf?src-supplier=Arrow.cn, ComponentLink4URL=https://datasheet.octopart.com:443/CGA4J1X7R1H475K125AC-TDK-datasheet-140571036.pdf?src-supplier=Arrow.cn, Height=1.25mm, Length=2mm, Lifecycle Status=Production, Manufacturer Part Number=CGA4J1X7R1H475K125AC, Material=Ceramic, Max Length=2.25mm, Max Width=1.5mm, Min Length=1.85mm, Min Width=1.1mm, Mounting Technology="Surface Mount", Number of Terminals=2, Pricing="1=0.52, 10=0.32, 50=0.2408, 100=0.2046, 500=0.17482, 1000=0.16204 (USD)", REACH SVHC=Yes, RoHS=Compliant, Schedule B="8532240020, 8532240020|8532240020|8532240020|8532240020|8532240020", Stock=396272, Supplier=DigiKey, Voltage Rating (DC)=50V, Width=1.25mm
C18 C24: "25V 2.2uF X7R ±10% 0603 Multilayer Ceramic Capacitors MLCC - SMD/SMT ROHS", Case/Package=0603, Dielectric Material=Ceramic, Manufacturer=Murata, Manufacturer Lifecycle Status="IN PRODUCTION", Max Operating Temperature=125°C, Min Operating Temperature=-55°C, Supplier Part Number=490-GRM188Z71E225KE43DDKR-ND, Tolerance=10%, Voltage Rating=25V, Category="Ceramic Capacitors", ComponentLink1Description=https://datasheet.octopart.com:443/GRM188Z71E225KE43D-Murata-datasheet-141276026.pdf?src-supplier=Geoflip, ComponentLink1URL=https://datasheet.octopart.com:443/GRM188Z71E225KE43D-Murata-datasheet-141276026.pdf?src-supplier=Geoflip, ComponentLink2Description=https://datasheet.octopart.com:443/GRM188Z71E225KE43D-Murata-datasheet-165579666.pdf?src-supplier=TME, ComponentLink2URL=https://datasheet.octopart.com:443/GRM188Z71E225KE43D-Murata-datasheet-165579666.pdf?src-supplier=TME, ComponentLink3Description=https://datasheet.octopart.com:443/GRM188Z71E225KE43D-Murata-datasheet-140705919.pdf?src-supplier=Ciiva, ComponentLink3URL=https://datasheet.octopart.com:443/GRM188Z71E225KE43D-Murata-datasheet-140705919.pdf?src-supplier=Ciiva, ComponentLink4Description=https://datasheet.octopart.com:443/GRM188Z71E225KE43D-Murata-datasheet-138743437.pdf?src-supplier=Ciiva, ComponentLink4URL=https://datasheet.octopart.com:443/GRM188Z71E225KE43D-Murata-datasheet-138743437.pdf?src-supplier=Ciiva, ComponentLink5Description=http://sigma.octopart.com:80/reach_statement/Murata-company-16.pdf?src-supplier=Compliance+Statements, ComponentLink5URL=http://sigma.octopart.com:80/reach_statement/Murata-company-16.pdf?src-supplier=Compliance+Statements, Height=800µm, Length=1.6mm, Lifecycle Status=Production, Manufacturer Part Number=GRM188Z71E225KE43D, Material=Ceramic, Mounting Technology="Surface Mount", Number of Terminals=2, Pricing="1=0.18, 10=0.105, 50=0.0744, 100=0.065, 500=0.04942, 1000=0.04462 (USD)", REACH SVHC=Yes, RoHS=Compliant, Stock=47639, Supplier=DigiKey, Thickness=800µm, Voltage Rating (DC)=25V, Width=800µm
C20 C21: "50V 1uF X7R ±10% 0603 Multilayer Ceramic Capacitors MLCC - SMD/SMT ROHS", Case Code (Imperial)=0603, Case Code (Metric)=1608, Dielectric=X7R, Dielectric Material=Ceramic, Manufacturer="Yageo Group", Max Operating Temperature=125°C, Min Operating Temperature=-55°C, Supplier Part Number=311-2082-1-ND, Tolerance=10%, Voltage Rating=50V, Case/Package=0603, Category="Ceramic Capacitors", China RoHS=Compliant, ComponentLink1Description=https://datasheet.octopart.com:443/CC0603KRX7R9BB105-Yageo-datasheet-177165144.pdf?src-supplier=IHS, ComponentLink1URL=https://datasheet.octopart.com:443/CC0603KRX7R9BB105-Yageo-datasheet-177165144.pdf?src-supplier=IHS, ComponentLink2Description=https://datasheet.octopart.com:443/CC0603KRX7R9BB105-Yageo-datasheet-82288757.pdf?src-supplier=Upverter, ComponentLink2URL=https://datasheet.octopart.com:443/CC0603KRX7R9BB105-Yageo-datasheet-82288757.pdf?src-supplier=Upverter, ComponentLink3Description=https://datasheet.octopart.com:443/CC0603KRX7R9BB105-Yageo-datasheet-149070022.pdf?src-supplier=Upverter, ComponentLink3URL=https://datasheet.octopart.com:443/CC0603KRX7R9BB105-Yageo-datasheet-149070022.pdf?src-supplier=Upverter, ComponentLink4Description=https://sigma.octopart.com:443/147830939/technical_drawing/Yageo-CC0603KRX7R9BB105.pdf?src-supplier=Upverter, ComponentLink4URL=https://sigma.octopart.com:443/147830939/technical_drawing/Yageo-CC0603KRX7R9BB105.pdf?src-supplier=Upverter, ComponentLink5Description=https://datasheet.octopart.com:443/CC0603KRX7R9BB105-Yageo-datasheet-181968729.pdf?src-supplier=Newark, ComponentLink5URL=https://datasheet.octopart.com:443/CC0603KRX7R9BB105-Yageo-datasheet-181968729.pdf?src-supplier=Newark, ComponentLink6Description=https://datasheet.octopart.com:443/CC0603KRX7R9BB105-Yageo-datasheet-147453679.pdf?src-supplier=Newark, ComponentLink6URL=https://datasheet.octopart.com:443/CC0603KRX7R9BB105-Yageo-datasheet-147453679.pdf?src-supplier=Newark, ComponentLink7Description=https://datasheet.octopart.com:443/CC0603KRX7R9BB105-Yageo-datasheet-181964739.pdf?src-supplier=Farnell, ComponentLink7URL=https://datasheet.octopart.com:443/CC0603KRX7R9BB105-Yageo-datasheet-181964739.pdf?src-supplier=Farnell, ComponentLink8Description=https://datasheet.octopart.com:443/CC0603KRX7R9BB105-Yageo-datasheet-151948686.pdf?src-supplier=TME, ComponentLink8URL=https://datasheet.octopart.com:443/CC0603KRX7R9BB105-Yageo-datasheet-151948686.pdf?src-supplier=TME, ComponentLink9Description=https://datasheet.octopart.com:443/CC0603KRX7R9BB105-Yageo-datasheet-166511530.pdf?src-supplier=Future+Electronics, ComponentLink9URL=https://datasheet.octopart.com:443/CC0603KRX7R9BB105-Yageo-datasheet-166511530.pdf?src-supplier=Future+Electronics, ComponentLink10Description=https://datasheet.octopart.com:443/CC0603KRX7R9BB105-Yageo-datasheet-137700082.pdf?src-supplier=Future+Electronics, ComponentLink10URL=https://datasheet.octopart.com:443/CC0603KRX7R9BB105-Yageo-datasheet-137700082.pdf?src-supplier=Future+Electronics, ComponentLink11Description=https://datasheet.octopart.com:443/CC0603KRX7R9BB105-Yageo-Group-datasheet-165992755.pdf?src-supplier=ODG+(Origin+Data+Global), ComponentLink11URL=https://datasheet.octopart.com:443/CC0603KRX7R9BB105-Yageo-Group-datasheet-165992755.pdf?src-supplier=ODG+(Origin+Data+Global), ComponentLink12Description=https://datasheet.octopart.com/Surface-Mount-Ceramic-Multilayer-Capacitors%3B-General-Purpose-%26-High-Capacitance-Class-2%2C-X7R-Yageo-datasheet-family-114.pdf, ComponentLink12URL=https://datasheet.octopart.com/Surface-Mount-Ceramic-Multilayer-Capacitors%3B-General-Purpose-%26-High-Capacitance-Class-2%2C-X7R-Yageo-datasheet-family-114.pdf, ComponentLink13Description=https://datasheet.octopart.com/CC0603KRX7R9BB105-Yageo-datasheet-10883670.pdf, ComponentLink13URL=https://datasheet.octopart.com/CC0603KRX7R9BB105-Yageo-datasheet-10883670.pdf, ComponentLink14Description=http://sigma.octopart.com:80/rohs_statement/Surface-Mount-Ceramic-Multilayer-Capacitors%3B-General-Purpose-%26-High-Capacitance-Class-2%2C-X7R-Yageo-family-124.pdf?src-supplier=Compliance+Statements, ComponentLink14URL=http://sigma.octopart.com:80/rohs_statement/Surface-Mount-Ceramic-Multilayer-Capacitors%3B-General-Purpose-%26-High-Capacitance-Class-2%2C-X7R-Yageo-family-124.pdf?src-supplier=Compliance+Statements, ComponentLink15Description=http://sigma.octopart.com:80/reach_statement/Surface-Mount-Ceramic-Multilayer-Capacitors%3B-General-Purpose-%26-High-Capacitance-Class-2%2C-X7R-Yageo-family-125.pdf?src-supplier=Compliance+Statements, ComponentLink15URL=http://sigma.octopart.com:80/reach_statement/Surface-Mount-Ceramic-Multilayer-Capacitors%3B-General-Purpose-%26-High-Capacitance-Class-2%2C-X7R-Yageo-family-125.pdf?src-supplier=Compliance+Statements, ComponentLink16Description=http://sigma.octopart.com:80/rohs_statement/Yageo-company-2.pdf?src-supplier=Compliance+Statements, ComponentLink16URL=http://sigma.octopart.com:80/rohs_statement/Yageo-company-2.pdf?src-supplier=Compliance+Statements, ComponentLink17Description=http://sigma.octopart.com:80/conflict_mineral_statement/Yageo-company-3.pdf?src-supplier=Compliance+Statements, ComponentLink17URL=http://sigma.octopart.com:80/conflict_mineral_statement/Yageo-company-3.pdf?src-supplier=Compliance+Statements, Composition=Ceramic, Halogen Free="Halogen Free", Height=800µm, Lead Free="Lead Free", Length=1.6mm, Lifecycle Status=Production, Manufacturer Part Number=CC0603KRX7R9BB105, Material=Ceramic, Mounting Technology="Surface Mount", Number of Terminals=2, Packaging="Tape & Reel (TR)", Pricing="1=0.47, 10=0.284, 50=0.2124, 100=0.1795, 500=0.15282, 1000=0.14128 (USD)", REACH SVHC=Yes, RoHS=Compliant, Schedule B="8532240020, 8532240020|8532240020|8532240020|8532240020|8532240020", Stock=118343, Supplier=DigiKey, Termination=SMD/SMT, Thickness=889µm, Voltage Rating (DC)=50V, Weight=2.012816mg, Width=800µm
D1 D2 D3: "Green 569nm LED Indication - Discrete 2.1V 0603 (1608 Metric)", Package=None, Availability=Unavailable, MF="{'manufacturer': u'Lite-On Inc.'}", MP=LTST-C190GKT, Price=None
J1 J2 J3 J4: "Connector Header Surface Mount, Right Angle 4 position 0.079\" (2.00mm)", Manufacturer_Name=JST, Copyright="Copyright (C) 2025 Ultra Librarian. All rights reserved.", Manufacturer_Part_Number=SM04B-PASS-TBT, RefDes=RefDes, Type=Type
L1A L1B: library part 7447709003, "WE-PD SMT Power Inductor, size 1210, 3.5uH, 11A, 9mOhm", Case/Size Code=1210, DC Resistance=6mOhm, DC Resistance Max=9mOhm, Inductance=3.5uH, Manufacturer="Wurth Elektronik", Operating Temperature Max=125°C, Operating Temperature Min=-40°C, Rated Current=11A, Saturation Current=16.5A, Self Resonant Frequency=45MHz, Category="Power Inductors", ComponentLink1Description="Website Link", ComponentLink1URL=https://www.we-online.com/redexpert/article/7447709003?ad, ComponentLink2Description="Datasheet Link", ComponentLink2URL=https://www.we-online.com/redexpert/spec/7447709003?ad, Height=10mm, Length=12mm, Manufacturer Part Number=7447709003, Match Code=WE-PD, Mount="Surface Mount", Packaging="Tape and Reel", Type=Standard, Width=12mm
PS1A PS1B: "10-A automotive buck converter optimized for power density and low EMI", Package="PowerVFQFN-16 Texas Instruments", Check_prices=https://www.snapeda.com/parts/LM61495QRPHRQ1/Texas+Instruments/view-part/?ref=eda, MF="Texas Instruments", MP=LM61495QRPHRQ1, SnapEDA_Link=https://www.snapeda.com/parts/LM61495QRPHRQ1/Texas+Instruments/view-part/?ref=snap
Q1 Q2: library part BSZ034N04LS, "N-Channel 40 V 19A (Ta), 40A (Tc) 2.1W (Ta), 52W (Tc) Surface Mount PG-TSDSON-8-FL", Manufacturer="Infineon Technologies", ManufacturerPartNumber=BSZ034N04LS, PackageReference="PG-TSDSON-8 FL"